# Altium PCB Pannel3.5x3.PcbDoc (part 1 of 4)
Units mil, origin at the board's own origin, x right, y up, seen from the top; angles counter-clockwise.
Board outline 3543.31 x 2771.65 mil, 4 copper layers (SIGNAL, GROUND, PWR, SIGNAL (Bottom)), stack 61.627 mil thick; 234 components, 186 nets, 894 pads, 439 vias.
Unrouted connection lines stored in the file: 4.
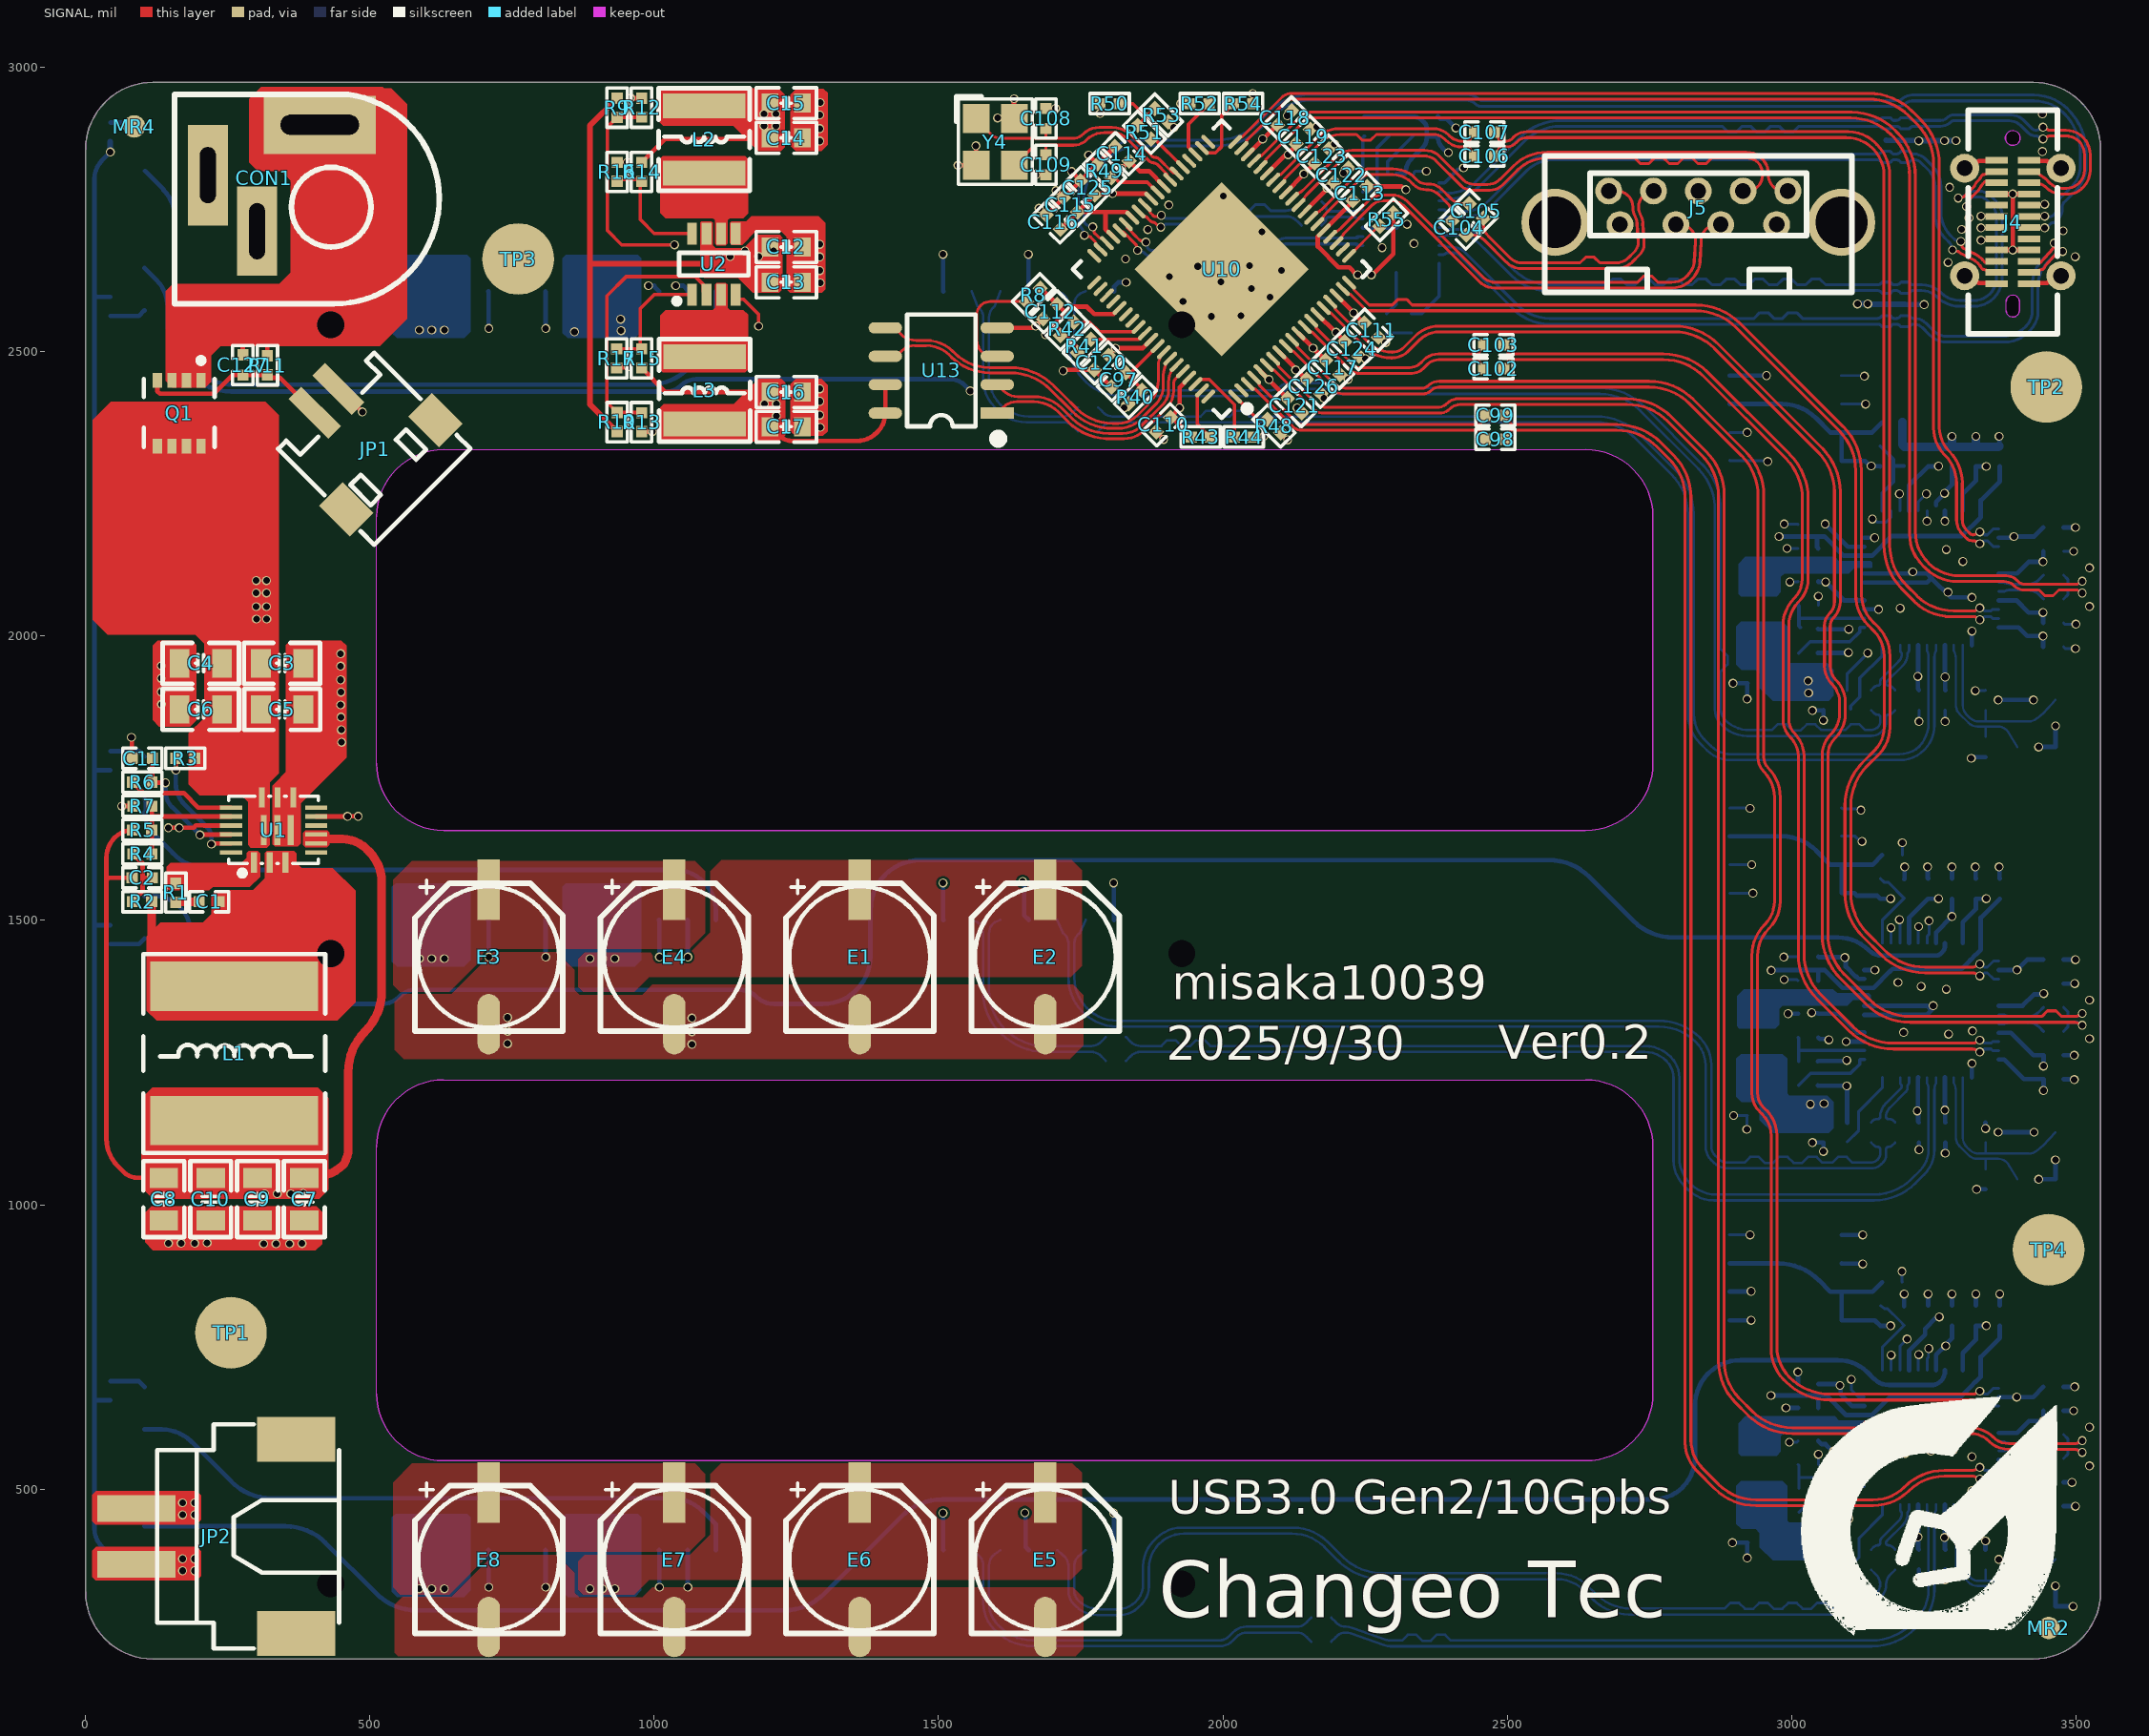
[diagram p0: SIGNAL view]
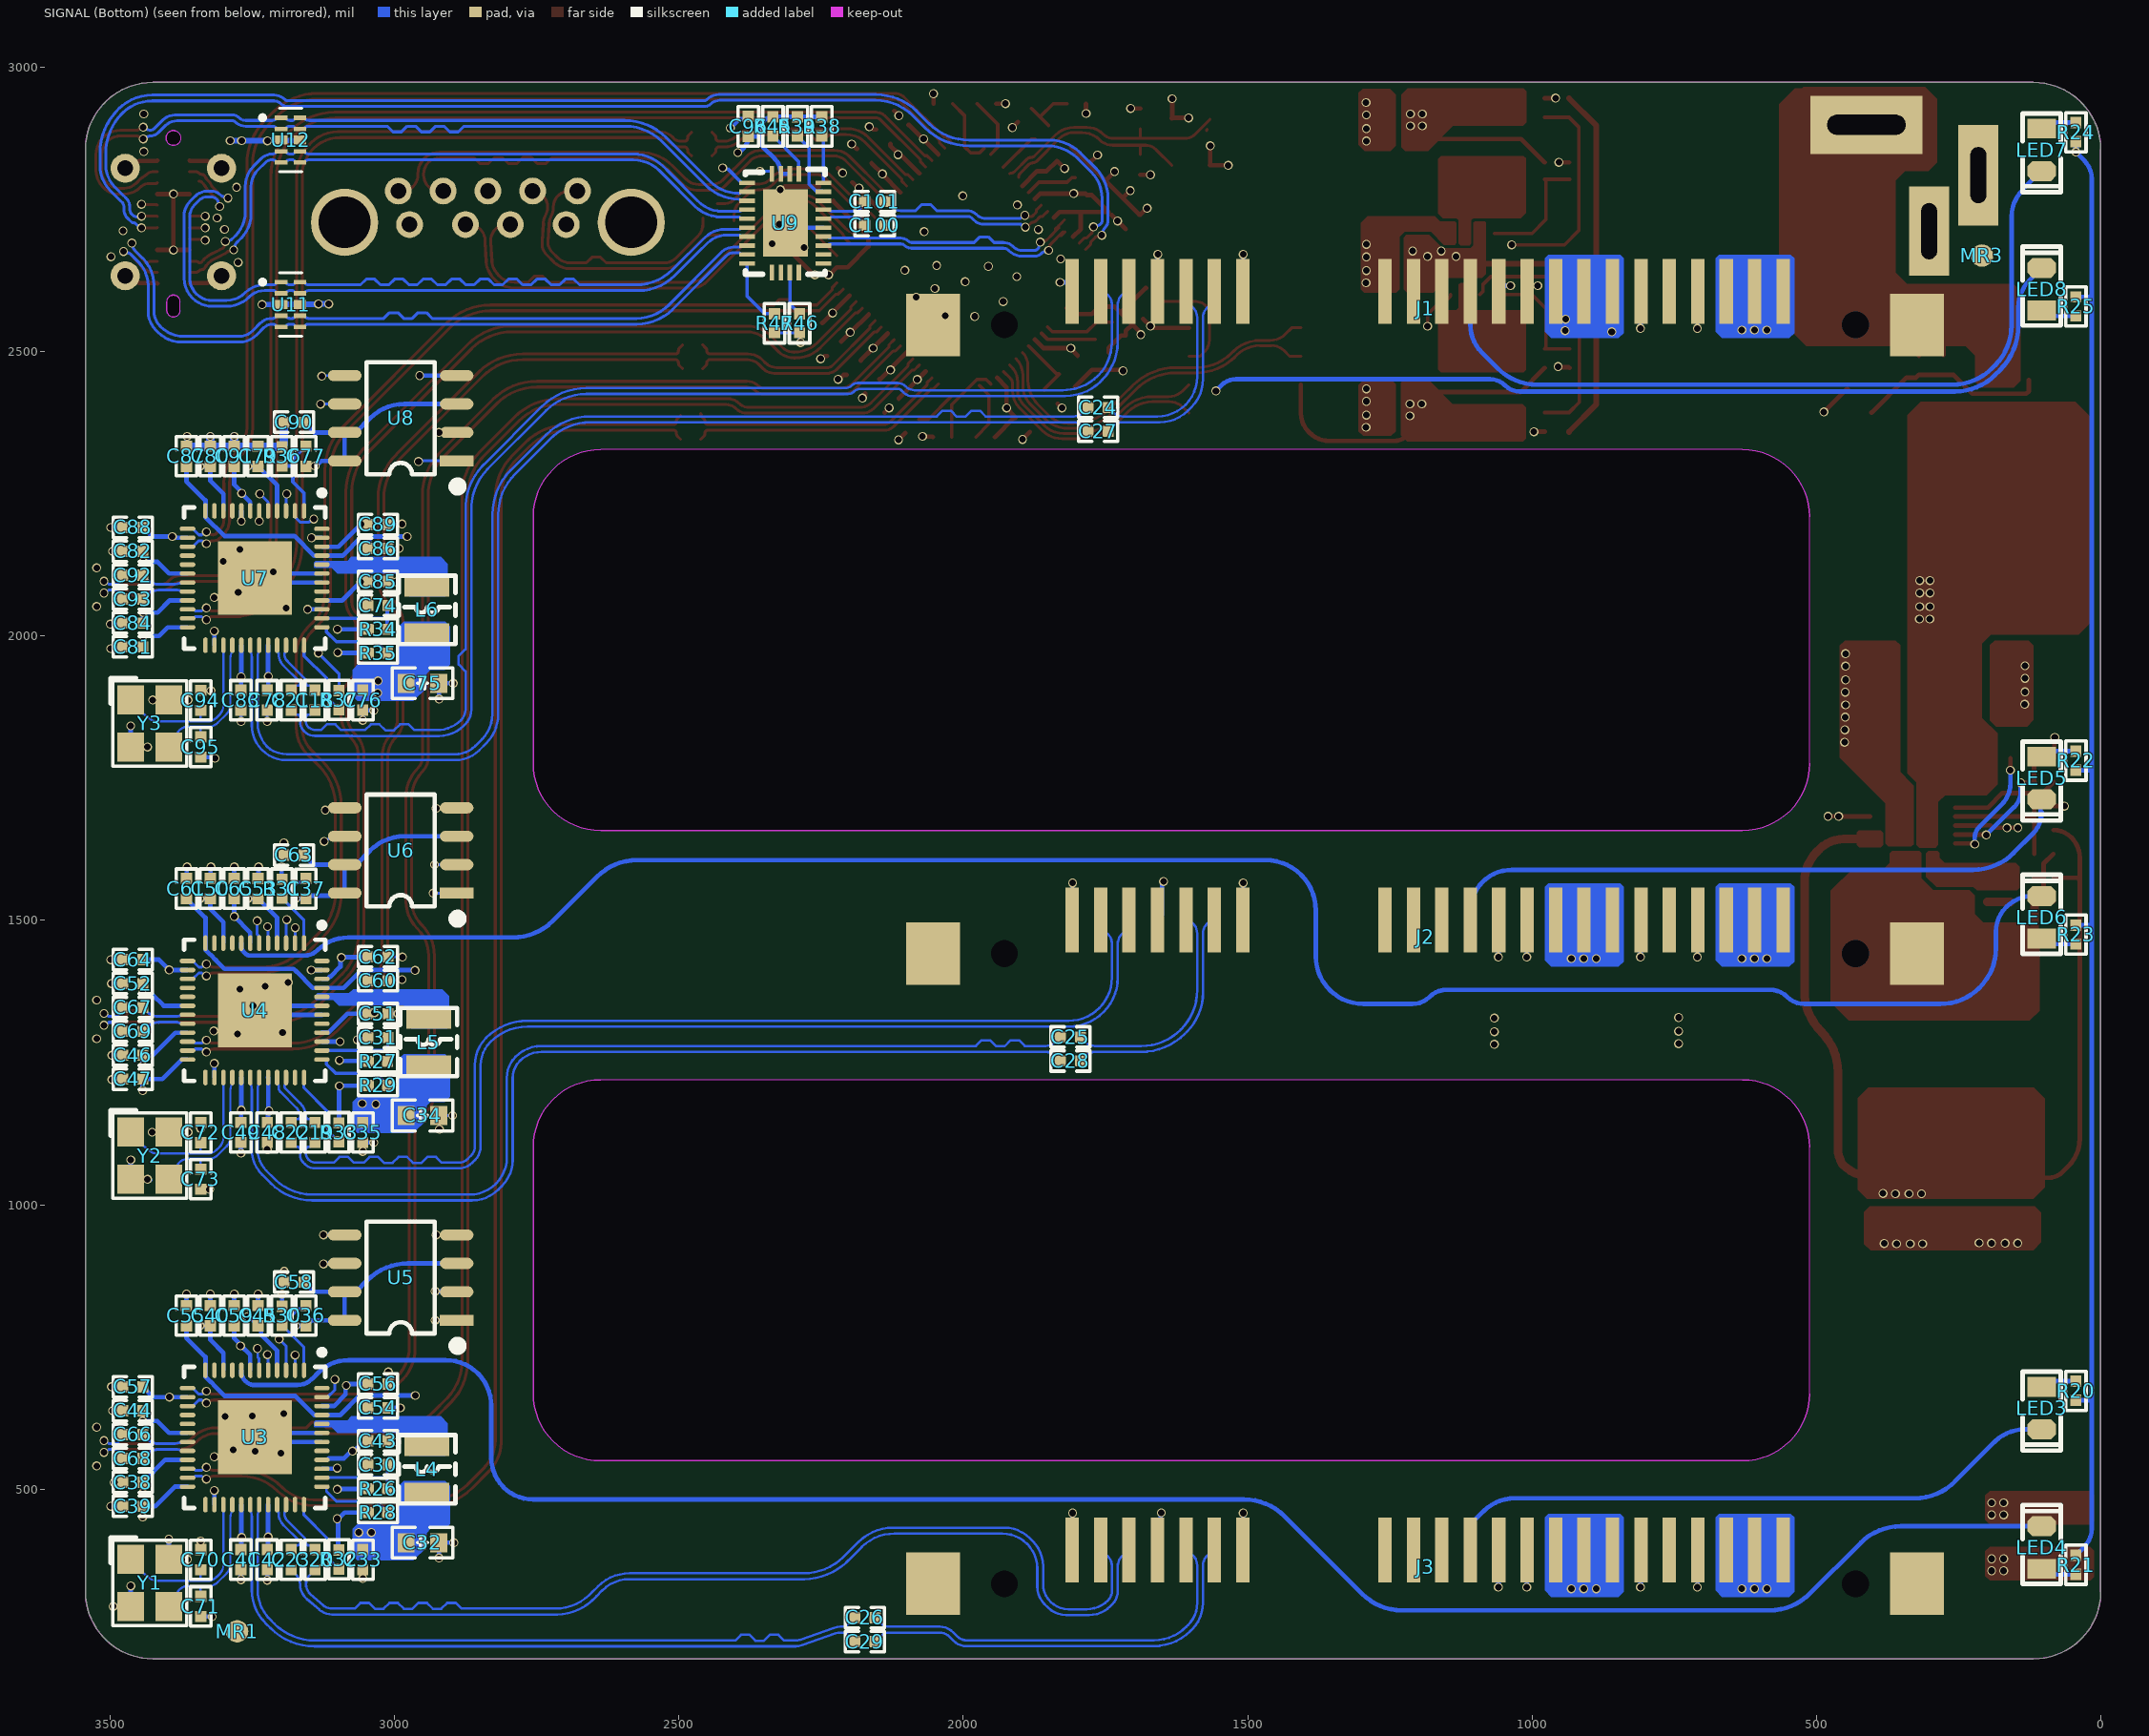
[diagram p1: SIGNAL (Bottom) view, seen from below]
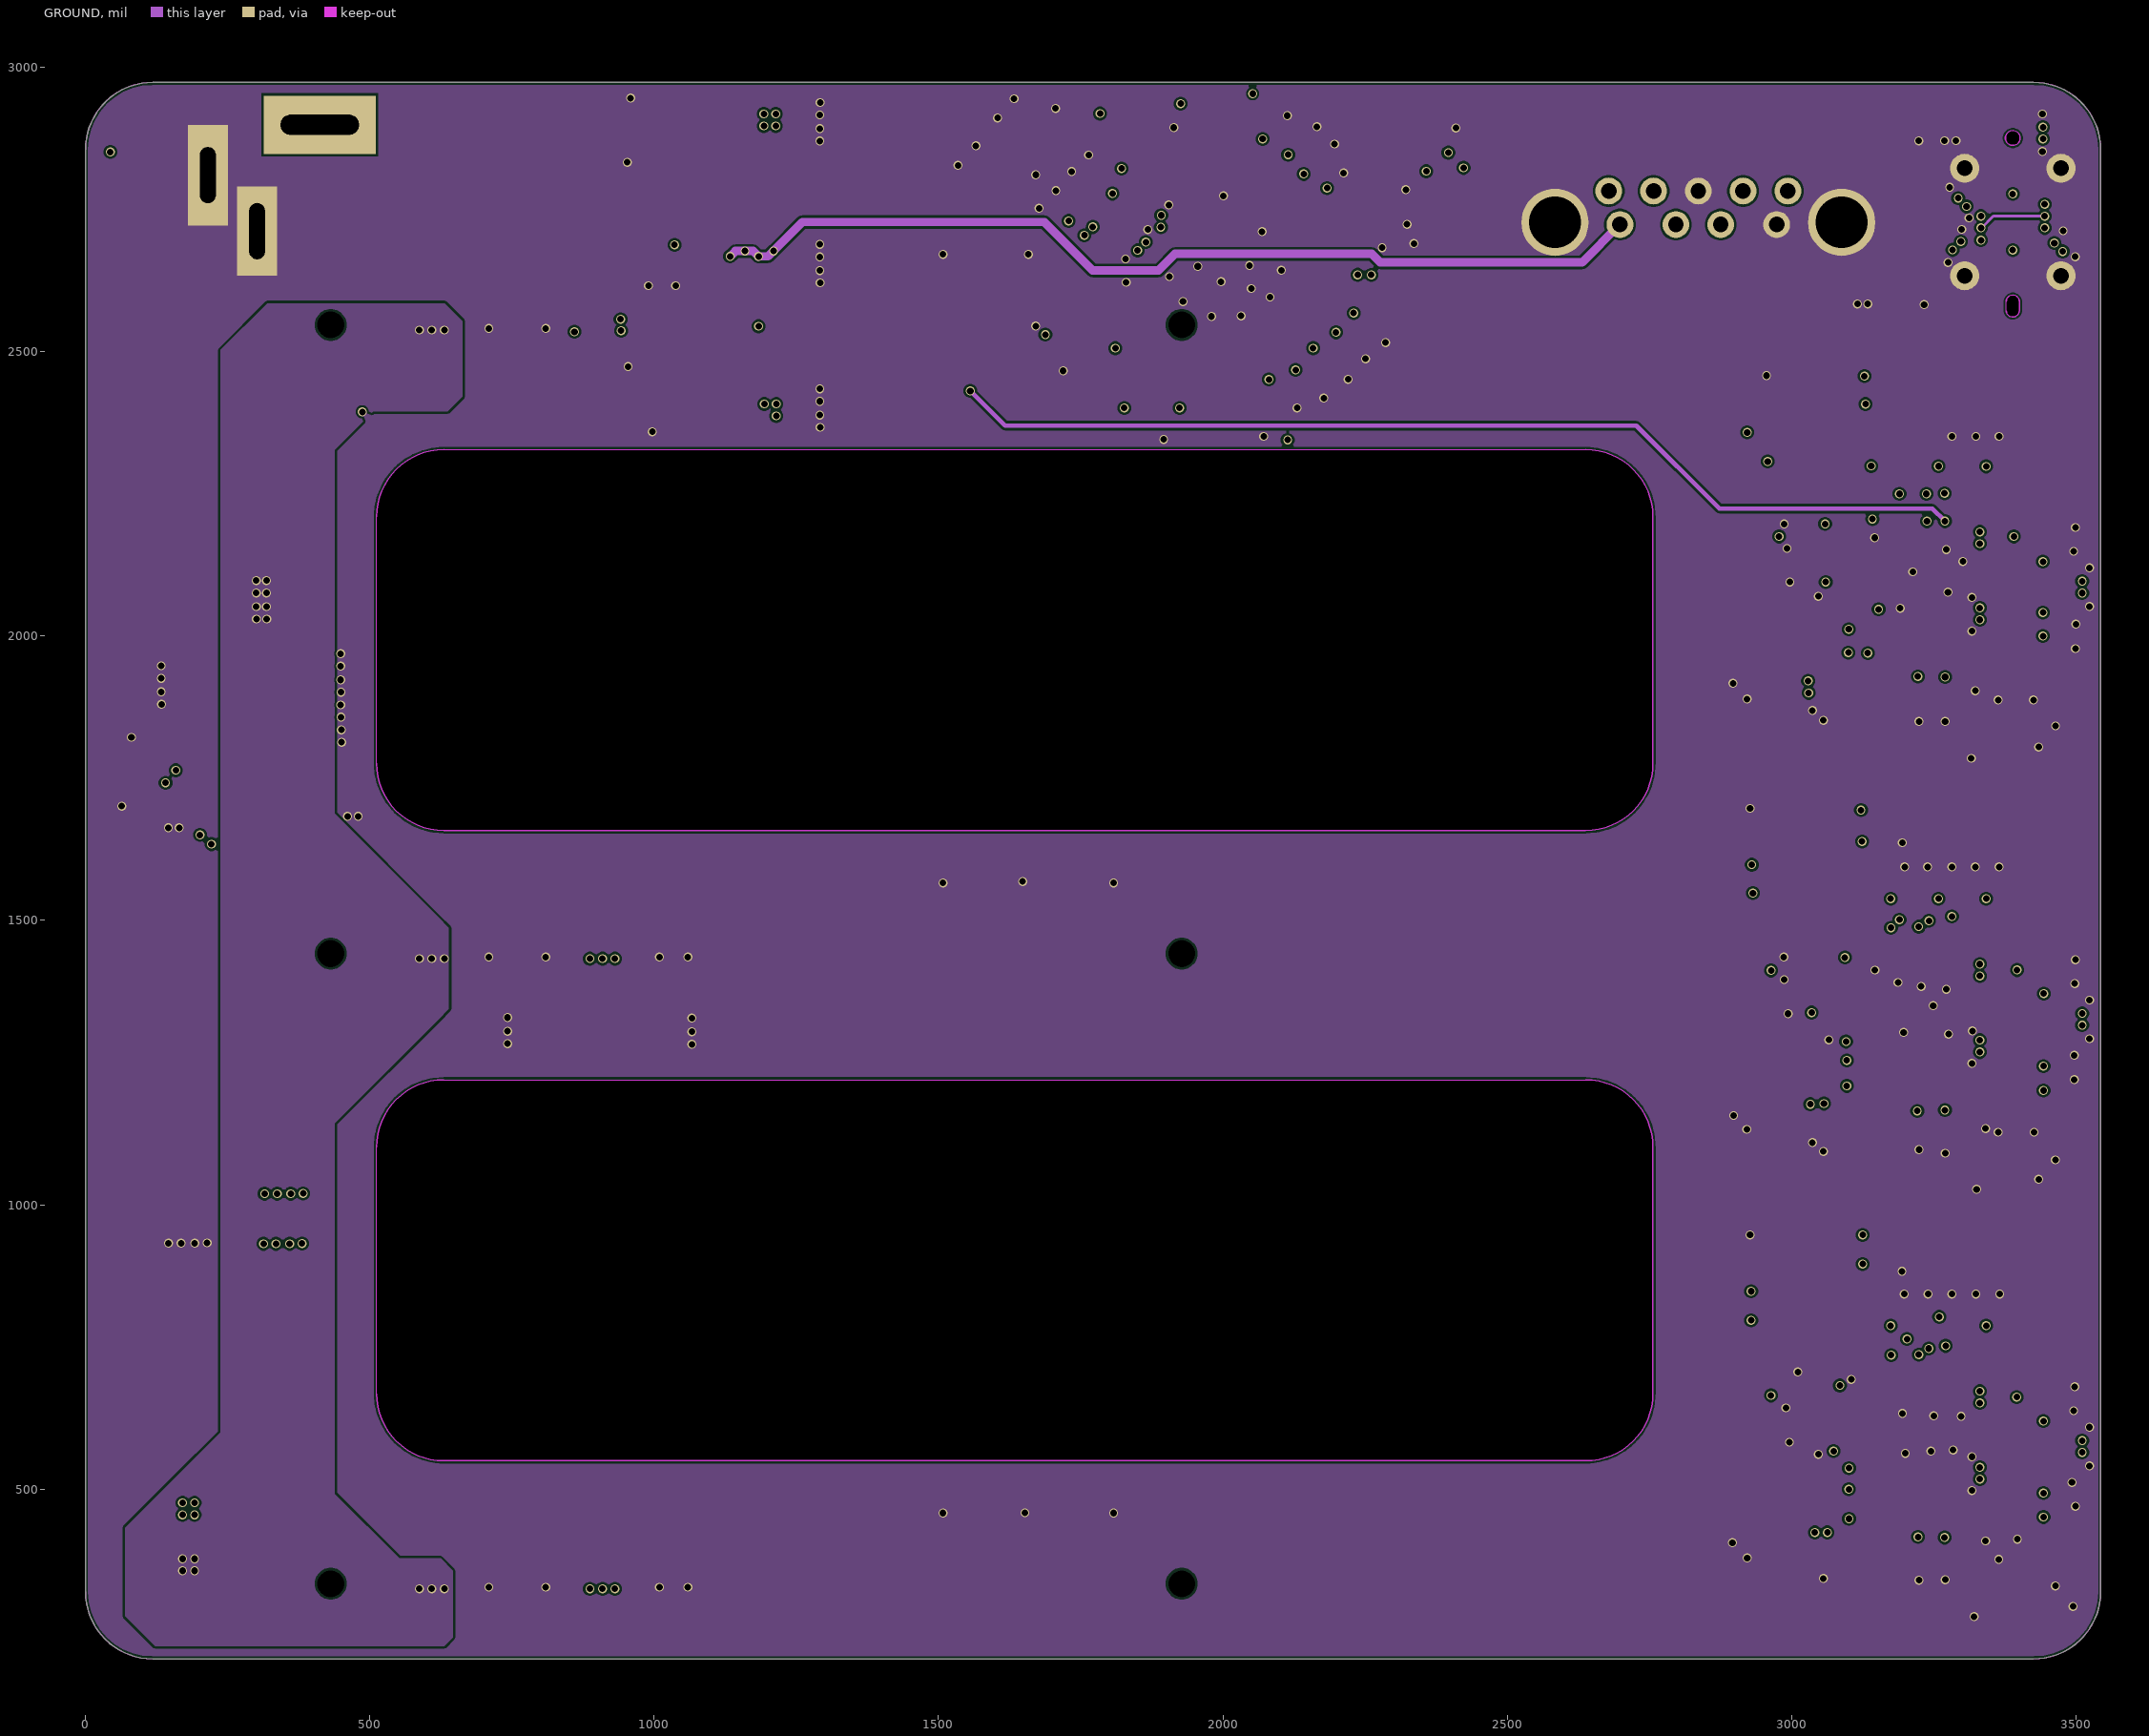
[diagram p2: GROUND]
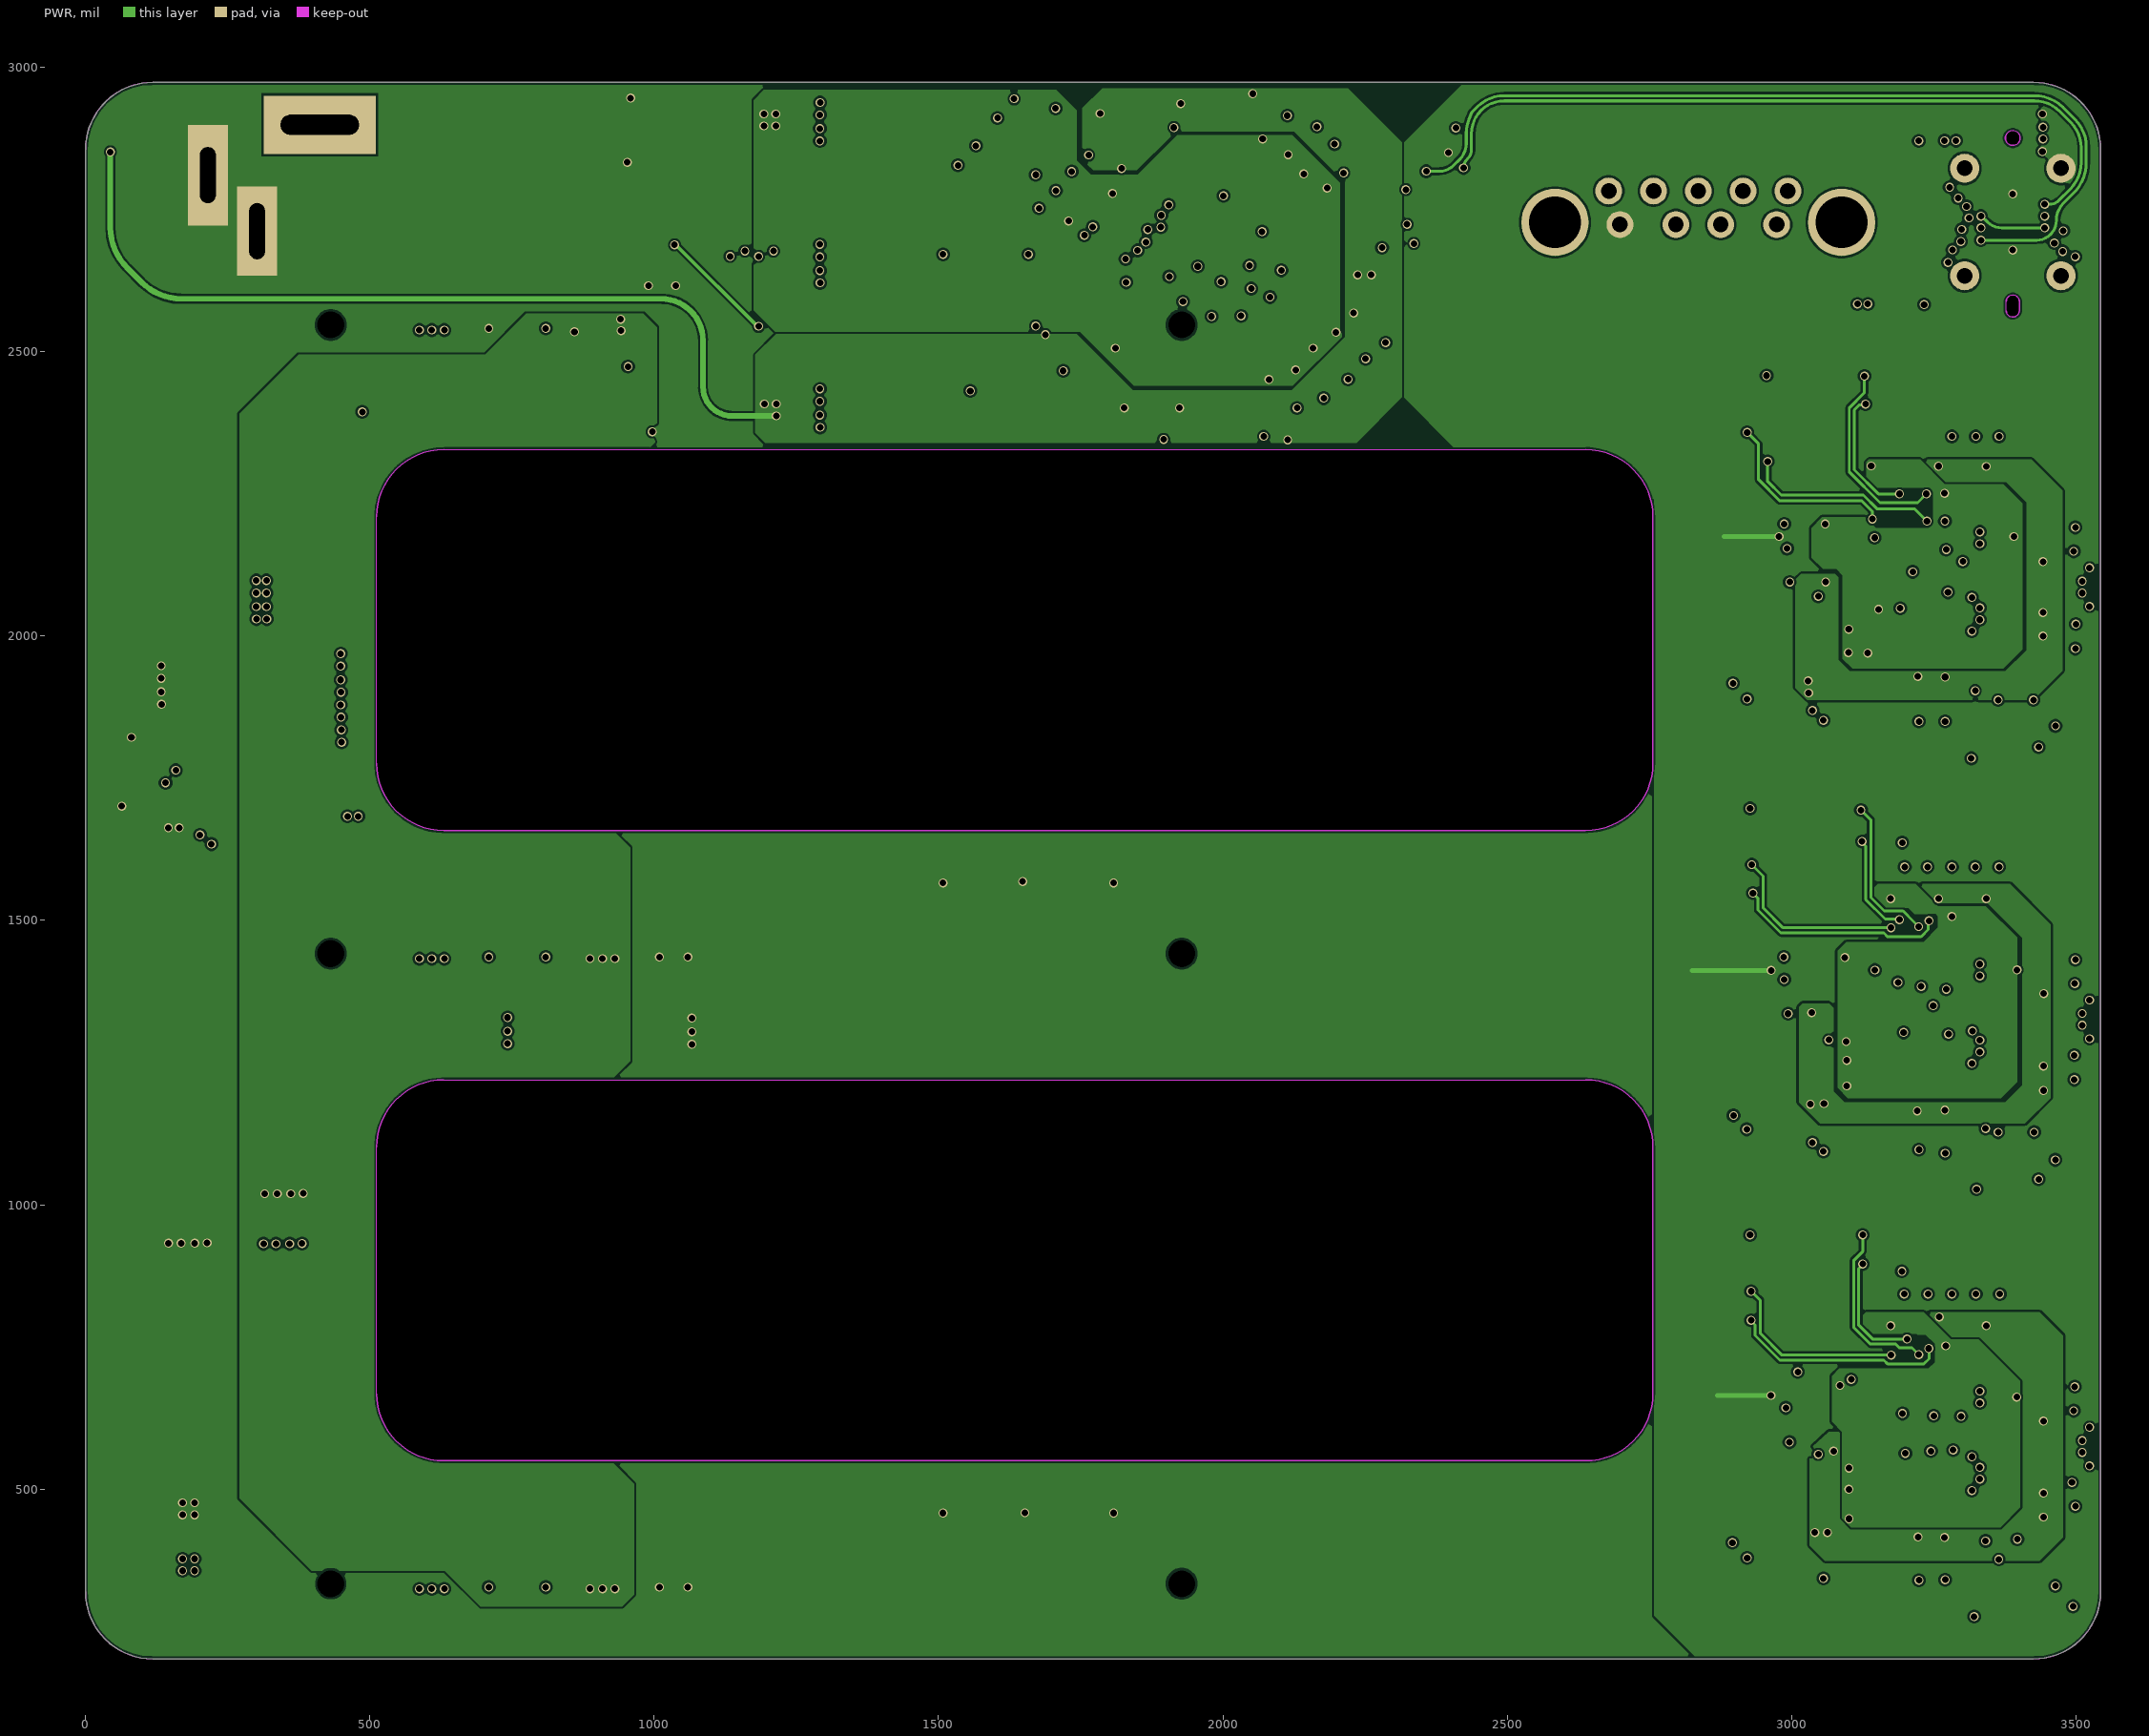
[diagram p3: PWR]
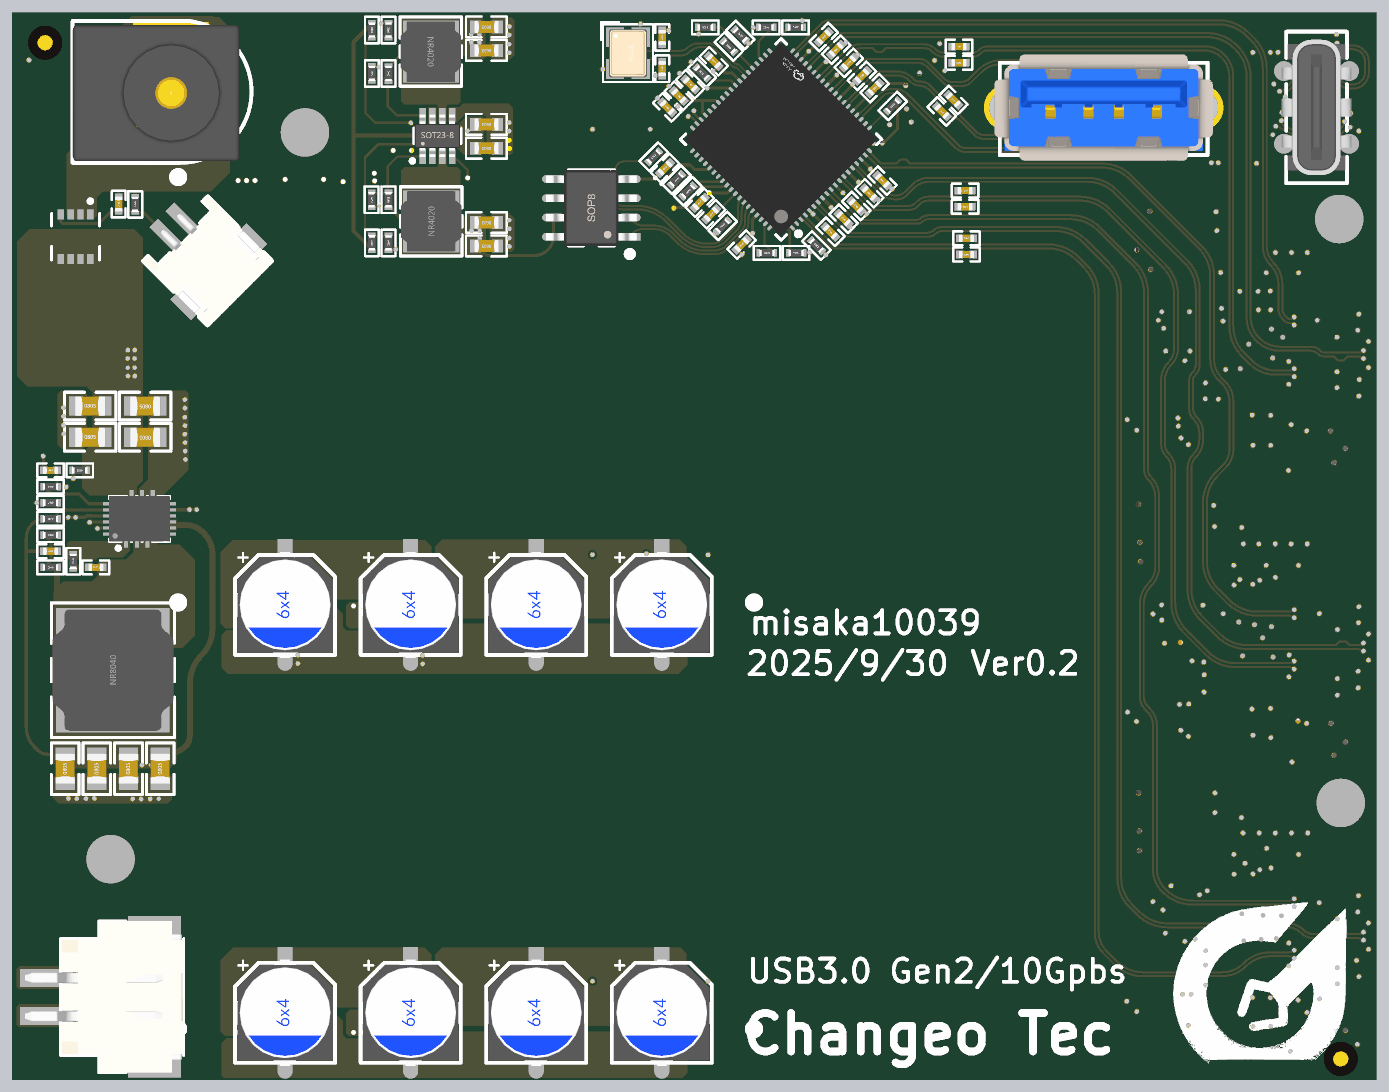
[diagram p7: 3D render of the assembled board from above, using the file's embedded part models]
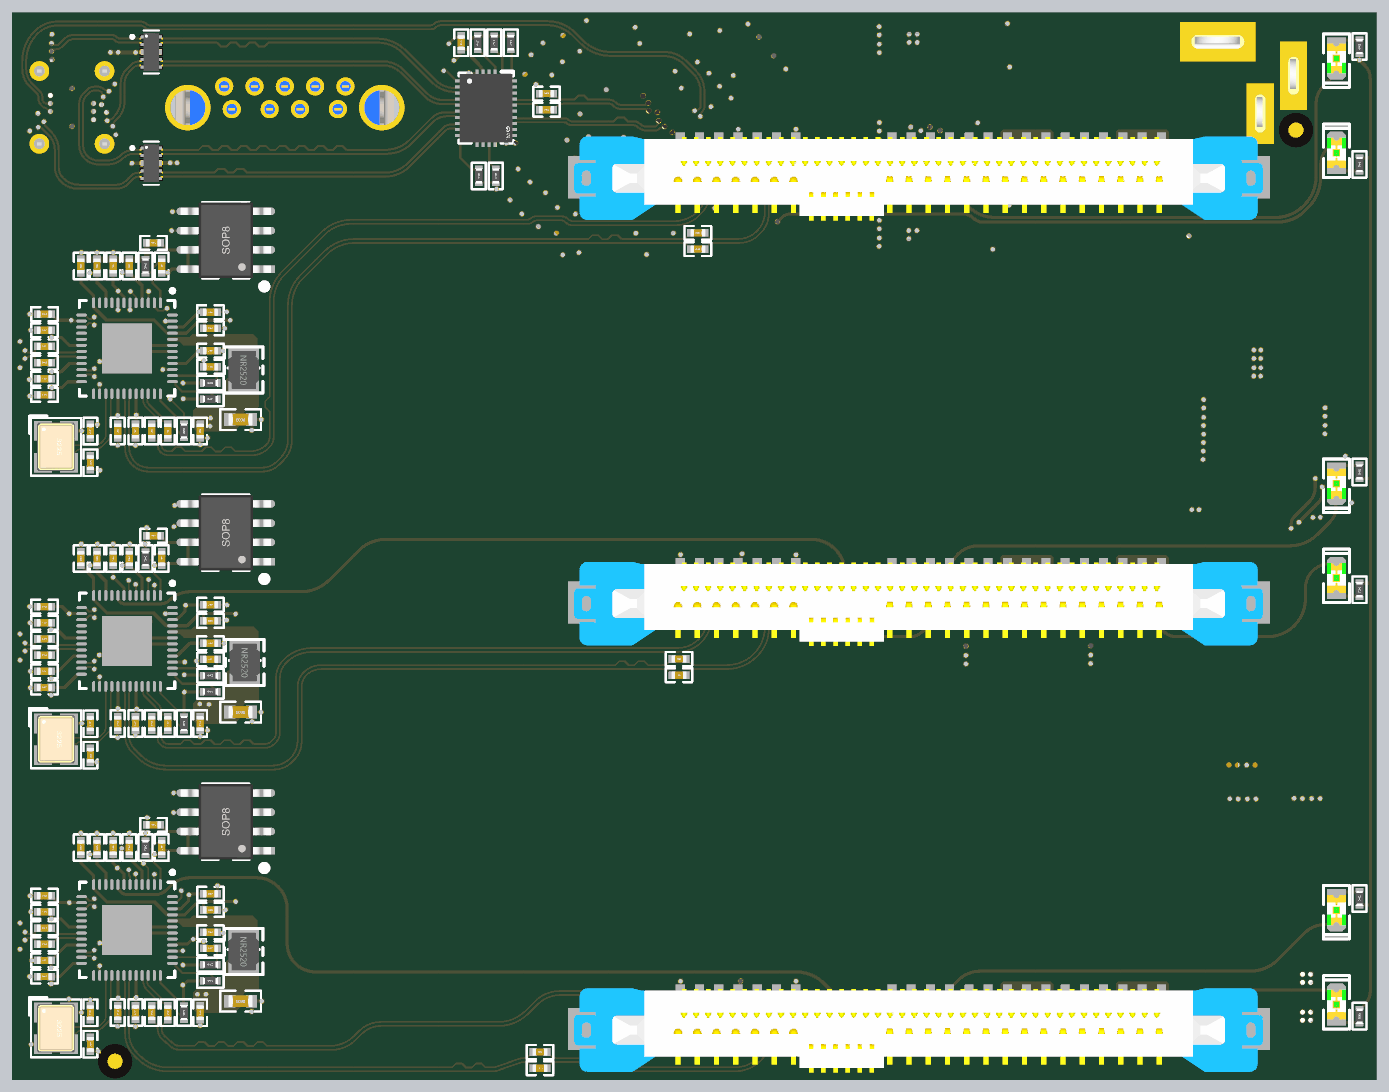
[diagram p8: 3D render of the assembled board from below, using the file's embedded part models]

## Layer stack, top to bottom
Top Solder: solder mask 0.3937, Solder Resist, Dk 3.5
SIGNAL: signal copper 1.4
Dielectric 2: prepreg 3.9134, PP-006, Dk 4.1
GROUND: signal copper 0.5984
Dielectric 1: dielectric 49.8031, FR-4, Dk 4.8
PWR: signal copper 0.5984
Dielectric 3: prepreg 3.9134, PP-006, Dk 4.1
SIGNAL (Bottom): signal copper 1.4
Bottom Solder: solder mask 0.3937, Solder Resist, Dk 3.5

## Board outline
118.36,201.69 cw(c118.4,319.85) 0.25,319.8 0.25,2855.24 cw(c118.34,2855.26) 118.36,2973.35 3425.45,2973.35 cw(c3425.54,2855.33) 3543.56,2855.24 3543.56,319.8 cw(c3425.47,319.78) 3425.45,201.69
cut-out: 630.17,1657.96 cw(c630.17,1776.07) 512.06,1776.07 512.06,2209.57 cw(c630.17,2209.57) 630.17,2327.68 2638.05,2327.68 cw(c2638.05,2209.57) 2756.16,2209.57 2756.16,1776.07 cw(c2638.05,1776.07) 2638.05,1657.96
cut-out: 512.06,668.09 512.06,1101.59 cw(c630.17,1101.59) 630.17,1219.7 2638.05,1219.7 cw(c2638.05,1101.59) 2756.16,1101.59 2756.16,668.09 cw(c2638.05,668.09) 2638.05,549.98 630.17,549.98 cw(c630.17,668.09)

## Design rules (kind name [scope] priority, off if disabled: settings)
Clearance [All] p1: gap=4 ignorepadtopadclearanceinfootprint=FALSE except(0: Arc-Text Arc-Hole Track-Text Track-Hole SMDPad-Text SMDPad-Hole THPad-Text THPad-Hole Via-Text Via-Hole Fill-Text Fill-Hole Poly-Text Poly-Hole Region-Text Region-Hole Text-Text Text-Hole; 5: Arc-Via Track-Via Via-Via; 6: SMDPad-Via THPad-Via; 10: THPad-THPad)
ComponentClearance [All] p1: gap=0 collisioncheckmode=3 verticalgap=0 showdistances=FALSE
DiffPairsRouting "Schematic Differential Pairs Routing_1" [InNetClass('SATA')] p1: maxlimit=6 minlimit=6 mostfreqgap=6 toplayer_minwidth=4.29 toplayer_maxwidth=4.29 toplayer_prefwidth=4.29 midlayer1_minwidth=4.29 midlayer1_maxwidth=4.29 midlayer1_prefwidth=4.29 midlayer2_minwidth=4.29 midlayer2_maxwidth=4.29 midlayer2_prefwidth=4.29 bottomlayer_minwidth=4.29 bottomlayer_maxwidth=4.29 bottomlayer_prefwidth=4.29 maxuncoupledlength=500
DiffPairsRouting "Schematic Differential Pairs Routing" [InNetClass('USB')] p2: maxlimit=5 minlimit=5 mostfreqgap=5 toplayer_minwidth=5.1 toplayer_maxwidth=5.1 toplayer_prefwidth=5.1 midlayer1_minwidth=5.1 midlayer1_maxwidth=5.1 midlayer1_prefwidth=5.1 midlayer2_minwidth=5.1 midlayer2_maxwidth=5.1 midlayer2_prefwidth=5.1 bottomlayer_minwidth=5.1 bottomlayer_maxwidth=5.1 bottomlayer_prefwidth=5.1 maxuncoupledlength=500
DiffPairsRouting [All] p3: maxlimit=10 minlimit=10 mostfreqgap=10 toplayer_minwidth=15 toplayer_maxwidth=15 toplayer_prefwidth=15 midlayer1_minwidth=15 midlayer1_maxwidth=15 midlayer1_prefwidth=15 midlayer2_minwidth=15 midlayer2_maxwidth=15 midlayer2_prefwidth=15 bottomlayer_minwidth=15 bottomlayer_maxwidth=15 bottomlayer_prefwidth=15 maxuncoupledlength=500
MinimumSolderMaskSliver [All] p1: minsoldermaskwidth=0
NetAntennae [All] p1 off: netantennaetolerance=3.94
PlaneClearance [All] p1: clearance=8
PlaneConnect [All] p1: planeconnectstyle=Direct reliefexpansion=20 reliefentries=4 reliefconductorwidth=10 reliefairgap=10
PolygonConnect [All] p1: connectstyle=Direct reliefconductorwidth=10 reliefentries=4 polygonreliefangle="90 Angle" airgapwidth=10
RoutingVias "Schematic Routing Via Style_1" [InNetClass('SATA')] p1: holewidth=11.81 width=15.75 viastyle="Through Hole" minholewidth=7.87 minwidth=11.81 maxholewidth=28 maxwidth=50
RoutingVias "Schematic Routing Via Style" [InNetClass('USB')] p2: holewidth=11.81 width=15.75 viastyle="Through Hole" minholewidth=7.87 minwidth=11.81 maxholewidth=28 maxwidth=39.37
RoutingVias [All] p3: holewidth=11.81 width=15.75 viastyle="Through Hole" minholewidth=11.81 minwidth=15.75 maxholewidth=19.68 maxwidth=23.62
SilkToSolderMaskClearance [IsPad] p1: minsilkscreentomaskgap=0 clearancetoexposedcopper=TRUE
SolderMaskExpansion 过孔盖油 [isvia] p1: expansion=4 istentingtop=TRUE
Width [All] p1: maxlimit=100 minlimit=2 preferedwidth=4
23 further rules are at their usual default settings.

## Classes and differential pairs
net class USB: cap_SSRX1_N cap_SSRX1_P cap_SSRX2_N cap_SSRX2_P cap_SSTX1_N cap_SSTX1_P cap_SSTX2_N cap_SSTX2_P cap_SSTX3_N cap_SSTX3_P cap_SSTX4_N cap_SSTX4_P cap_SSTX_N cap_SSTX_P HSD1_N HSD1_P HSD2_N HSD2_P HSD3_N HSD3_P HSD4_N HSD4_P IN_CC1 IN_CC2 IN_SSRX1_N IN_SSRX1_P IN_SSRX2_N IN_SSRX2_P IN_SSTX1_N IN_SSTX1_P IN_SSTX2_N IN_SSTX2_P SSRX1_N SSRX1_P SSRX2_N SSRX2_P SSRX3_N SSRX3_P SSRX4_N SSRX4_P SSRX_N SSRX_P SSTX1_N SSTX1_P SSTX2_N SSTX2_P SSTX3_N SSTX3_P SSTX4_N SSTX4_P SSTX_N SSTX_P USBD_N USBD_P
net class SATA: cap_RX1_N cap_RX1_P cap_RX2_N cap_RX2_P cap_RX3_N cap_RX3_P cap_TX1_N cap_TX1_P cap_TX2_N cap_TX2_P cap_TX3_N cap_TX3_P RX1_N RX1_P RX2_N RX2_P RX3_N RX3_P TX1_N TX1_P TX2_N TX2_P TX3_N TX3_P
net class PWR: GND VBUS VCC1V0 VCC1V2-A VCC1V2-B VCC1V2-C VCC3V3 VCC3V3-A VCC3V3-B VCC3V3-C VCC5V VCC12V VIN
component class vl822: C96 C97 C98 C99 C100 C101 C102 C103 C104 C105 C106 C107 C108 C109 C110 C111 C112 C113 C114 C115 C116 C117 C118 C119 C120 C121 C122 C123 C124 C125 C126 R8 R38 R39 R40 R41 R42 R43 R44 R45 R46 R47 R48 R49 R50 R51 R52 R53 R54 R55 U9 U10 U11 U12 U13 Y4
component class pwr: C1 C2 C3 C4 C5 C6 C7 C8 C9 C10 C11 C12 C13 C14 C15 C16 C17 C127 E1 E2 E3 E4 E5 E6 E7 E8 JP1 JP2 L1 L2 L3 MR1 MR2 MR3 MR4 Q1 R1 R2 R3 R4 R5 R6 R7 R9 R10 R11 R12 R13 R14 R15 R16 R17 U1 U2
component class jmb575: C30 C31 C32 C33 C34 C35 C36 C37 C38 C39 C40 C41 C42 C43 C44 C45 C46 C47 C48 C49 C50 C51 C52 C53 C54 C55 C56 C57 C58 C59 C60 C61 C62 C63 C64 C65 C66 C67 C68 C69 C70 C71 C72 C73 C74 C75 C76 C77 C78 C79 C80 C81 C82 C83 C84 C85 C86 C87 C88 C89 C90 C91 C92 C93 C94 C95 L4 L5 L6 R26 R27 R28 R29 R30 R31 R32 R33 R34 R35 R36 R37 U3 U4 U5 U6 U7 U8 Y1 Y2 Y3
component class connector: C18 C19 C20 C21 C22 C23 C24 C25 C26 C27 C28 C29 CON1 J1 J2 J3 J4 J5 LED3 LED4 LED5 LED6 LED7 LED8 R20 R21 R22 R23 R24 R25 TP1 TP2 TP3 TP4
differential pair cap_SSRX4: +cap_SSRX4_P -cap_SSRX4_N
differential pair cap_SSRX1: +cap_SSRX1_P -cap_SSRX1_N
differential pair SSTX1: +SSTX1_P -SSTX1_N
differential pair cap_TX2: +cap_TX2_P -cap_TX2_N
differential pair cap_RX3: +cap_RX3_P -cap_RX3_N
differential pair TX1: +TX1_P -TX1_N
differential pair RX1: +RX1_P -RX1_N
differential pair cap_TX3: +cap_TX3_P -cap_TX3_N
differential pair cap_RX2: +cap_RX2_P -cap_RX2_N
differential pair USBD: +USBD_P -USBD_N
differential pair TX3: +TX3_P -TX3_N
differential pair TX2: +TX2_P -TX2_N
differential pair SSTX: +SSTX_P -SSTX_N
differential pair SSTX4: +SSTX4_P -SSTX4_N
differential pair SSTX3: +SSTX3_P -SSTX3_N
differential pair SSTX2: +SSTX2_P -SSTX2_N
differential pair SSRX: +SSRX_P -SSRX_N
differential pair SSRX4: +SSRX4_P -SSRX4_N
differential pair SSRX3: +SSRX3_P -SSRX3_N
differential pair SSRX2: +SSRX2_P -SSRX2_N
differential pair SSRX1: +SSRX1_P -SSRX1_N
differential pair RX3: +RX3_P -RX3_N
differential pair RX2: +RX2_P -RX2_N
differential pair IN_SSTX2: +IN_SSTX2_P -IN_SSTX2_N
differential pair IN_SSTX1: +IN_SSTX1_P -IN_SSTX1_N
differential pair IN_SSRX2: +IN_SSRX2_P -IN_SSRX2_N
differential pair IN_SSRX1: +IN_SSRX1_P -IN_SSRX1_N
differential pair HSD4: +HSD4_P -HSD4_N
differential pair HSD3: +HSD3_P -HSD3_N
differential pair HSD2: +HSD2_P -HSD2_N
differential pair HSD1: +HSD1_P -HSD1_N
differential pair cap_TX1: +cap_TX1_P -cap_TX1_N
differential pair cap_SSTX: +cap_SSTX_P -cap_SSTX_N
differential pair cap_SSTX4: +cap_SSTX4_P -cap_SSTX4_N
differential pair cap_SSTX3: +cap_SSTX3_P -cap_SSTX3_N
differential pair cap_SSTX2: +cap_SSTX2_P -cap_SSTX2_N
differential pair cap_SSTX1: +cap_SSTX1_P -cap_SSTX1_N
differential pair cap_SSRX3: +cap_SSRX2_P -cap_SSRX2_N
differential pair cap_RX1: +cap_RX1_P -cap_RX1_N

## Components (designator, comment, footprint, x,y, rotation, side; value= is the part's Value field where it differs from the comment)
C1 "220nF 25V" C0402_L 217.72,1533 r0 top
C2 "220pF 25V" C0402_L 100.13,1575 r0 top
C3 "22uF 25V" C0805_L 345.79,1952 r180 top
C4 "22uF 25V" C0805_L 203,1952 r0 top
C5 "4.7uF 25V" C0805_L 346,1871 r180 top
C6 "100nF 25V" C0805_L 203,1871 r0 top
C7 "22uF 10V" C0805_L 385,1010 r90 top
C8 "22uF 10V" C0805_L 138,1010 r90 top
C9 "22uF 10V" C0805_L 302.66,1010 r90 top
C10 "22uF 10V" C0805_L 220.33,1010 r90 top
C11 "1uF 25V" C0402_L 100.13,1785 r0 top
C12 "22uF 10V" C0603_L 1232.54,2684 r180 top
C13 "22uF 10V" C0603_L 1232.54,2622 r180 top
C14 "4.7uF 6.3V" C0603_L 1232.54,2876 r180 top
C15 "22uF 6.3V" C0603_L 1232.54,2937 r180 top
C16 "22uF 6.3V" C0603_L 1232.54,2429 r180 top
C17 "4.7uF 6.3V" C0603_L 1232.54,2368 r180 top
C18 "10nF 6.3V" C0402_L 3140,1887.28 r90 bottom
C19 "10nF 6.3V" C0402_L 3140,1127.28 r90 bottom
C20 "10nF 6.3V" C0402_L 3140,376 r90 bottom
C21 "10nF 6.3V" C0402_L 3182,1887.28 r90 bottom
C22 "10nF 6.3V" C0402_L 3182,1127.28 r90 bottom
C23 "10nF 6.3V" C0402_L 3182,376 r90 bottom
C24 "10nF 6.3V" C0402_L 1763,2402 r0 bottom
C25 "10nF 6.3V" C0402_L 1812,1295 r0 bottom
C26 "10nF 6.3V" C0402_L 2173,274 r0 bottom
C27 "10nF 6.3V" C0402_L 1763,2360 r0 bottom
C28 "10nF 6.3V" C0402_L 1812,1253 r0 bottom
C29 "10nF 6.3V" C0402_L 2173,232 r0 bottom
C30 "1uF 10V" C0402_L 3029.28,543 r180 bottom
C31 "1uF 10V" C0402_L 3029.28,1294 r180 bottom
C32 "10uF 6.3V" C0603_L 2951,406 r0 bottom
C33 "100nF 6.3V" C0402_L 3056,376 r90 bottom
C34 "10uF 6.3V" C0603_L 2951,1157 r0 bottom
C35 "100nF 6.3V" C0402_L 3056,1127.28 r90 bottom
C36 "1uF 10V" C0402_L 3156,805 r270 bottom
C37 "1uF 10V" C0402_L 3156,1556 r270 bottom
C38 "100nF 6.3V" C0402_L 3460.55,512 r180 bottom
C39 "100nF 6.3V" C0402_L 3460.55,470 r180 bottom
C40 "100nF 6.3V" C0402_L 3324,805 r270 bottom
C41 "100nF 6.3V" C0402_L 3270.22,376.28 r90 bottom
C42 "100nF 6.3V" C0402_L 3224,376.28 r90 bottom
C43 "100nF 6.3V" C0402_L 3029.28,585 r0 bottom
C44 "100nF 6.3V" C0402_L 3460.55,638 r180 bottom
C45 "100nF 6.3V" C0402_L 3240,805 r270 bottom
C46 "100nF 6.3V" C0402_L 3460.55,1263 r180 bottom
C47 "100nF 6.3V" C0402_L 3460.55,1221 r180 bottom
C48 "100nF 6.3V" C0402_L 3224,1127.28 r90 bottom
C49 "100nF 6.3V" C0402_L 3270.22,1127.28 r90 bottom
C50 "100nF 6.3V" C0402_L 3324,1556 r270 bottom
C51 "100nF 6.3V" C0402_L 3029.28,1336 r0 bottom
C52 "100nF 6.3V" C0402_L 3460.55,1389 r180 bottom
C53 "100nF 6.3V" C0402_L 3240,1556 r270 bottom
C54 "100nF 6.3V" C0402_L 3029.28,643 r0 bottom
C55 "100nF 6.3V" C0402_L 3366,805 r270 bottom
C56 "100nF 6.3V" C0402_L 3029.28,685 r0 bottom
C57 "100nF 6.3V" C0402_L 3460.55,680 r180 bottom
C58 "100nF 6.3V" C0402_L 3177,864 r180 bottom
C59 "100nF 6.3V" C0402_L 3282,805 r270 bottom
C60 "100nF 6.3V" C0402_L 3029.28,1394 r0 bottom
C61 "100nF 6.3V" C0402_L 3366,1556 r270 bottom
C62 "100nF 6.3V" C0402_L 3029.28,1436 r0 bottom
C63 "100nF 6.3V" C0402_L 3177,1615 r180 bottom
C64 "100nF 6.3V" C0402_L 3460.55,1431 r180 bottom
C65 "100nF 6.3V" C0402_L 3282,1556 r270 bottom
C66 "100nF 6.3V" C0402_L 3460.55,596 r180 bottom
C67 "100nF 6.3V" C0402_L 3460.55,1347 r180 bottom
C68 "100nF 6.3V" C0402_L 3460.55,554 r180 bottom
C69 "100nF 6.3V" C0402_L 3460.55,1305 r180 bottom
C70 "33pF/16V" C0402_L 3341,376 r90 bottom
C71 "33pF/16V" C0402_L 3341,294 r270 bottom
C72 "33pF/16V" C0402_L 3341,1127 r90 bottom
C73 "33pF/16V" C0402_L 3341,1045 r270 bottom
C74 "1uF 10V" C0402_L 3029.28,2054 r180 bottom
C75 "10uF 6.3V" C0603_L 2951,1917 r0 bottom
C76 "100nF 6.3V" C0402_L 3056,1887.28 r90 bottom
C77 "1uF 10V" C0402_L 3156,2316 r270 bottom
C78 "100nF 6.3V" C0402_L 3224,1887.28 r90 bottom
C79 "100nF 6.3V" C0402_L 3240,2316 r270 bottom
C80 "100nF 6.3V" C0402_L 3324,2316 r270 bottom
C81 "100nF 6.3V" C0402_L 3460.55,1981 r180 bottom
C82 "100nF 6.3V" C0402_L 3460.55,2149 r180 bottom
C83 "100nF 6.3V" C0402_L 3270.22,1887.28 r90 bottom
C84 "100nF 6.3V" C0402_L 3460.55,2023 r180 bottom
C85 "100nF 6.3V" C0402_L 3029.28,2096 r0 bottom
C86 "100nF 6.3V" C0402_L 3029.28,2154 r0 bottom
C87 "100nF 6.3V" C0402_L 3366,2316 r270 bottom
C88 "100nF 6.3V" C0402_L 3460.55,2191 r180 bottom
C89 "100nF 6.3V" C0402_L 3029.28,2196 r0 bottom
C90 "100nF 6.3V" C0402_L 3177,2376 r180 bottom
C91 "100nF 6.3V" C0402_L 3282,2316 r270 bottom
C92 "100nF 6.3V" C0402_L 3460.55,2107 r180 bottom
C93 "100nF 6.3V" C0402_L 3460.55,2065 r180 bottom
C94 "33pF/16V" C0402_L 3341,1887 r90 bottom
C95 "33pF/16V" C0402_L 3341,1805 r270 bottom
C96 "100nF 10V" C0402_L 2378,2896.13 r270 bottom
C97 "100nF 6.3V" C0402_L 1816.47,2450.47 r225 top
C98 "100nF 6.3V" C0402_L 2479.5,2345.9 r180 top
C99 "100nF 6.3V" C0402_L 2479.5,2387.9 r180 top
C100 "100nF 6.3V" C0402_L 2156,2722 r180 bottom
C101 "100nF 6.3V" C0402_L 2156,2764 r180 bottom
C102 "100nF 6.3V" C0402_L 2476,2470 r180 top
C103 "100nF 6.3V" C0402_L 2476,2512 r180 top
C104 "100nF 6.3V" C0402_L 2415.47,2717.53 r135 top
C105 "100nF 6.3V" C0402_L 2445.47,2747.53 r135 top
C106 "100nF 6.3V" C0402_L 2460,2844 r180 top
C107 "100nF 6.3V" C0402_L 2460,2886 r180 top
C108 "22pF/16V" C0402_L 1689,2910 r90 top
C109 "22pF/16V" C0402_L 1689,2828.72 r270 top
C110 "100nF 6.3V" C0402_L 1895.47,2371.47 r45 top
C111 "100nF 6.3V" C0402_L 2261,2538 r135 top
C112 "100nF 6.3V" C0402_L 1696.47,2570.47 r45 top
C113 "100nF 6.3V" C0402_L 2241,2778 r225 top
C114 "100nF 6.3V" C0402_L 1823,2848 r315 top
C115 "100nF 6.3V" C0402_L 1732,2758 r315 top
C116 "100nF 6.3V" C0402_L 1702,2728 r315 top
C117 "100nF 6.3V" C0402_L 2193,2472 r135 top
C118 "100nF 6.3V" C0402_L 2109,2911 r225 top
C119 "100nF 6.3V" C0402_L 2141,2878 r225 top
C120 "100nF 6.3V" C0402_L 1786.47,2480.47 r45 top
C121 "100nF 6.3V" C0402_L 2126,2405 r135 top
C122 "100nF 6.3V" C0402_L 2208,2810 r225 top
C123 "100nF 6.3V" C0402_L 2174,2844 r225 top
C124 "100nF 6.3V" C0402_L 2227,2505 r135 top
C125 "100nF 6.3V" C0402_L 1762,2788 r315 top
C126 "100nF 6.3V" C0402_L 2160,2439 r135 top
C127 "1nF 25V" C0402_L 277,2476.72 r270 top
CON1 "3.5*1.3" DC-012 412.24,2899.01 r270 top locked
E1 "100uF/25V" "CS 6*4 - B" 1361.8,1435.67 r90 top
E2 "100uF/25V" "CS 6*4 - B" 1688,1435.67 r90 top
E3 "100uF/25V" "CS 6*4 - B" 709.41,1435.67 r90 top
E4 "100uF/25V" "CS 6*4 - B" 1035.61,1435.67 r90 top
E5 "100uF/25V" "CS 6*4 - B" 1688,376 r90 top
E6 "100uF/25V" "CS 6*4 - B" 1361.8,376 r90 top
E7 "100uF/25V" "CS 6*4 - B" 1035.61,376 r90 top
E8 "100uF/25V" "CS 6*4 - B" 709.41,376 r90 top
J1 "SATA15P" "SATA 15P 贴片" 1927.6,2547.04 r180 bottom locked
J2 "SATA15P" "SATA 15P 贴片" 1927.6,1441.78 r180 bottom locked
J3 "SATA15P" "SATA 15P 贴片" 1927.6,333.8 r180 bottom locked
J4 "Typec 24p" "TypeC 24p 直立" 3389,2728 r270 top locked
J5 "USB3.1_Type-A" "USB3.1_Type-A 立式直插" 2836,2753 r0 top locked
JP1 "HDR-1X2" ZH1.5-WS-2P 537,2301 r45 top
JP2 "HDR-1X2" XH2.54-WS-2P 286,417 r90 top
L1 "2.2uH" NR8040 262,1266 r90 top
L2 "1uH" NR4020 1088,2873.06 r270 top
L3 "2uH" NR4020 1089,2431.94 r90 top
L4 "4.7uH" NR2520 2943,535 r270 bottom
L5 "4.7uH" NR2520 2940.1,1286 r270 bottom
L6 "4.7uH" NR2520 2943,2046 r270 bottom
LED3 "blue" "LED 0805B" 104,642.55 r270 bottom locked
LED4 "green" "LED 0805G" 104,397.46 r90 bottom locked
LED5 "blue" "LED 0805B" 104,1750.53 r270 bottom locked
LED6 "green" "LED 0805G" 104,1505.44 r90 bottom locked
LED7 "blue" "LED 0805B" 104,2855 r270 bottom locked
LED8 "green" "LED 0805G" 104,2609.91 r90 bottom locked
MR1 "MARK1.6" "Mark 1" 3277,250 r180 bottom
MR2 "MARK1.6" "Mark 1" 3452,256 r0 top
MR3 "MARK1.6" "Mark 1" 209,2669 r180 bottom
MR4 "MARK1.6" "Mark 1" 86,2896 r0 top
Q1 "AO3401" DFN8-L3.0-W3.0-P0.65_EP 165,2392 r270 top
R1 "4.7R 1%" R0402_L 159,1548.73 r270 top
R2 "1M 1%" R0402_L 100,1533 r180 top
R3 "499K 5%" R0402_L 175.73,1785 r180 top
R4 "499R 1%" R0402_L 100.25,1617 r0 top
R5 "150K 1%" R0402_L 100,1659 r180 top
R6 "100K 5%" R0402_L 100,1743 r180 top
R7 "18K 1%" R0402_L 100.25,1701 r0 top
R8 "10K 1%" R0402_L 1667,2600 r45 top
R9 "100K 1%" R0402_L 935,2928.75 r270 top
R10 "100K 1%" R0402_L 935,2376.25 r90 top
R11 "10K 1%" R0402_L 320,2476 r270 top
R12 "130K 1%" R0402_L 978,2929 r90 top
R13 "130K 1%" R0402_L 978,2376 r270 top
R14 "390K 1%" R0402_L 978,2816 r270 top
R15 "390K 1%" R0402_L 978,2488.27 r90 top
R16 "130K 1%" R0402_L 935,2816.25 r90 top
R17 "88.7K 1%" R0402_L 934,2488.01 r270 top
R20 "4.7K 1%" R0402_L 44,673 r90 bottom
R21 "4.7K 1%" R0402_L 44,367 r270 bottom
R22 "4.7K 1%" R0402_L 44,1781 r90 bottom
R23 "4.7K 1%" R0402_L 44,1475 r270 bottom
R24 "4.7K 1%" R0402_L 44,2886 r90 bottom
R25 "4.7K 1%" R0402_L 44,2579.73 r270 bottom
R26 "330K 1%" R0402_L 3029.28,501 r180 bottom
R27 "330K 1%" R0402_L 3029.28,1252 r180 bottom
R28 "4.7K 1%" R0402_L 3029.28,459 r180 bottom
R29 "4.7K 1%" R0402_L 3029.28,1210 r180 bottom
R30 "100K 1%" R0402_L 3198,804.87 r270 bottom
R31 "100K 1%" R0402_L 3198,1555.87 r270 bottom
R32 "12K 1%" R0402_L 3098,376.41 r270 bottom
R33 "12K 1%" R0402_L 3098,1127.41 r270 bottom
R34 "330K 1%" R0402_L 3029.28,2012 r180 bottom
R35 "4.7K 1%" R0402_L 3029.28,1970 r180 bottom
R36 "100K 1%" R0402_L 3198,2315.87 r270 bottom
R37 "12K 1%" R0402_L 3098,1887.41 r270 bottom
R38 "10K 1%" R0402_L 2249,2896 r270 bottom
R39 "10K 1%" R0402_L 2292,2896 r270 bottom
R40 "4.7K 1%" R0402_L 1846.17,2420.17 r225 top
R41 "4.7K 1%" R0402_L 1756.17,2510.17 r225 top
R42 "4.7K 1%" R0402_L 1726.17,2540.17 r225 top
R43 "4.7K 1%" R0402_L 1961.27,2350 r180 top
R44 "4.7K 1%" R0402_L 2037,2350 r0 top
R45 "10K 1%" R0402_L 2335,2896.25 r90 bottom
R46 "20K 1%" R0402_L 2288,2550 r90 bottom
R47 "20K 1%" R0402_L 2332,2550 r90 bottom
R48 "4.7K 1%" R0402_L 2090,2369 r315 top
R49 "12.4k 1%" R0402_L 1792,2818 r135 top
R50 "4.7K 1%" R0402_L 1801,2936 r180 top
R51 "1M 1%" R0402_L 1862,2886 r135 top
R52 "4.7K 1%" R0402_L 1959,2936 r180 top
R53 "10K 1%" R0402_L 1892,2916 r315 top
R54 "4.7K 1%" R0402_L 2035.73,2936 r0 top
R55 "4.7K 1%" R0402_L 2288,2732 r45 top
TP1 "M3hole" m3内嵌螺母贴片 256,775 r0 top
TP2 "M3hole" m3内嵌螺母贴片 3448,2438 r0 top
TP3 "M3hole" m3内嵌螺母贴片 761,2663 r0 top
TP4 "M3hole" m3内嵌螺母贴片 3452,921 r0 top
U1 "MP8757" MP8757 331.09,1659 r0 top
U2 "MP9148" SOT23-8 1105,2654 r90 top
U3 "JMS578" QFN48-L6.0-W6.0-P0.4 3246,591 r270 bottom
U4 "JMS578" QFN48-L6.0-W6.0-P0.4 3246,1342 r270 bottom
U5 "P25Q21H" SOP8_L 2989.39,872 r0 bottom
U6 "P25Q21H" SOP8_L 2989.39,1623 r0 bottom
U7 "JMS578" QFN48-L6.0-W6.0-P0.4 3246,2102 r270 bottom
U8 "P25Q21H" SOP8_L 2989.39,2383 r0 bottom
U9 "VL160" MQFN-28_L4.5-W3.5-P0.40-BL-EP 2313,2726 r270 bottom
U10 "VL822 Q7" QFN-76_L9.0-W9.0-P0.40-EP6.3-TL 1998,2645 r135 top locked
U11 "TPD4E02B04" DIO_TPD4E02B04DQAR 3183,2583 r180 bottom
U12 "TPD4E02B04" DIO_TPD4E02B04DQAR 3183,2872 r180 bottom
U13 "P25Q21H" SOP8_L 1505,2467 r180 top
Y1 "30Mhz" "OSC 3225-4P" 3430.46,335.34 r270 bottom
Y2 "30Mhz" "OSC 3225-4P" 3430.46,1086.34 r270 bottom
Y3 "30Mhz" "OSC 3225-4P" 3430.46,1846.34 r270 bottom
Y4 "25Mhz" "OSC 3225-4P" 1600,2869 r270 top

## Footprints (in the part's own frame and the unit in brackets; to place one, negate y for a bottom-side part, rotate by r counter-clockwise, add the part's x,y. Pads: shape width x height; smd on the part's side, far side on the other; paste and mask are expansions set on the pad)
C0402_L [mm] "贴片MLCC电容"
  rect 0.5x0.5 smd: 1(-0.45,0) 2(0.45,0)
  silkscreen extent -0.87,-0.46 0.88,0.46, body extent -0.5,-0.25 0.5,0.25, height 0.5
C0603_L [mm] "贴片MLCC电容"
  rect 0.75x0.85 smd: 1(-0.725,0) 2(0.725,0)
  silkscreen extent -1.35,-0.69 1.35,0.69, body extent -0.8,-0.4 0.8,0.4, height 0.8
C0805_L [mil] "贴片MLCC电容"
  rect 35x50 smd: 1(-37.4,0) 2(37.4,0)
  silkscreen extent -67,-36 67,36, body extent -39,-26 39,26, height 51
"CS 6*4 - B" [mm] "直径6mm，高4mm"
  rect 2.7x1 smd: 1(3,0)
  oval 2.7x1 smd: 2(-3,0)
  silkscreen extent -3.3,-3.3 3.43,3.3, body extent -3.5,-3.15 3.5,3.15, height 4.05
DC-012 [mm] "5.5*2.1"
  rect 2.6x5 hole 0.9 slot 3.5 at 90 deg: 1(0,0)
  rect 4.5x1.8 hole 0.7 slot 2.5 at 0 deg: 2(2.25,-5)
  rect 4x1.8 hole 0.7 slot 2.5 at 0 deg: 3(4.75,-2.8)
  silkscreen extent -1.35,-6.48 8,5.33, body extent -1.11,-6.47 7.89,4.53, height 13.6
DFN8-L3.0-W3.0-P0.65_EP [mm] "DFN, 8-Leads, Body 3.05x3.05mm, Pitch 0.65mm               联系卖家 免费查找封装"
  rect 0.66x0.42 smd: 1(-1.47,-0.975) 2(-1.47,0.975) 2(-1.47,-0.325) 2(-1.47,0.325) 3(1.47,0.975) 3(1.47,-0.325) 3(1.47,0.325) 3(1.47,-0.975)
  SIGNAL region: 1.33,-1.185 1.33,1.185 -0.5,1.185 -0.5,-1.185
  SIGNAL region: 0.25,-1.73 0.25,1.73 -0.32,1.73 -0.32,-1.73
  silkscreen extent -2.47,-1.59 1.53,1.59, body extent -1.53,-1.53 1.53,1.53, height 0.8
DIO_TPD4E02B04DQAR [mm]
  rect 0.565x0.2 smd mask+0: 1(-0.417,1) 2(-0.417,0.5) 4(-0.417,-0.5) 5(-0.417,-1) 6(0.417,-1) 7(0.417,-0.5) 9(0.417,0.5) 10(0.417,1)
  rect 0.565x0.4 smd paste-1 mask+0: 3(-0.417,0) 8(0.417,0)
  silkscreen extent -1.35,-1.42 0.5,1.42, body extent -0.5,-1.25 0.5,1.25, height 0.55
"LED 0805B" [mil] "蓝色0805LED"
  rect 35x50 smd: 1(-37.4,-0.01)
  oct 35x50 smd: 2(37.4,-0.01)
  silkscreen extent -64,-33 75,33, body extent -39,-25 39,25, height 32
"LED 0805G" [mil] "绿色0805LED"
  rect 35x50 smd: 1(-37.4,0)
  oct 35x50 smd: 2(37.4,0)
  silkscreen extent -64,-33 75,33, body extent -39,-25 39,25, height 32
m3内嵌螺母贴片 [mm]
  round 3.2 smd: 4(0,0)
"Mark 1" [mm] "光学定位点，直径1mm"
  round 1 smd paste-1 mask+0.635: Mark(0,0)
  SIGNAL pour cut-out: 0,-1.143 -0.437,-1.056 -0.808,-0.808 -1.056,-0.437 -1.143,0 -1.143,0 -1.056,0.437 -0.808,0.808 -0.437,1.056 0,1.143 0,1.143 0.437,1.056 0.808,0.808 1.056,0.437 1.143,0 1.143,0 1.056,-0.437 0.808,-0.808 0.437,-1.056 0,-1.143
MP8757 [mm]
  rect 0.267x0.902 smd: 1(-0.875,-1.451) 2(-0.175,-1.451) 3(0.525,-1.451) 10(0.875,1.451) 11(0.175,1.451) 12(-0.525,1.451)
  rect 1x0.2 smd: 4(1.9,-1) 5(1.9,-0.6) 6(1.9,-0.2) 7(1.9,0.2) 8(1.9,0.6) 9(1.9,1) 13(-1.9,1) 14(-1.9,0.6) 15(-1.9,0.2) 16(-1.9,-0.2) 17(-1.9,-0.6) 18(-1.9,-1)
  rect 0.267x1.35 smd: 19(-0.44,0) 20(0.16,0) 21(0.76,0)
  silkscreen extent -2,-2.05 2,1.5, body extent -2.01,-1.51 2.01,1.51, height 0.92
MQFN-28_L4.5-W3.5-P0.40-BL-EP [mm]
  rect 0.2x0.7 smd paste-100: 1(-1.8,-1.7) 2(-1.4,-1.7) 3(-1,-1.7) 4(-0.6,-1.7) 5(-0.2,-1.7) 6(0.2,-1.7) 7(0.6,-1.7) 8(1,-1.7) 9(1.4,-1.7) 10(1.8,-1.7) 15(1.8,1.7) 16(1.4,1.7) 17(1,1.7) 18(0.6,1.7) 19(0.2,1.7) 20(-0.2,1.7) 21(-0.6,1.7) 22(-1,1.7) 23(-1.4,1.7) 24(-1.8,1.7)
  rect 0.7x0.2 smd paste-100: 11(2.2,-0.6) 12(2.2,-0.2) 13(2.2,0.2) 14(2.2,0.6) 25(-2.2,0.6) 26(-2.2,0.2) 27(-2.2,-0.2) 28(-2.2,-0.6)
  rect 3x2 smd paste-100: 29(0,0)
  silkscreen extent -2.41,-1.78 2.29,1.78, body extent -2.26,-1.76 2.26,1.76, height 0.86
NR2520 [mm] "2.5mm*2.0mm*1.0mm(长*宽*高）"
  rect 0.85x2 smd: 1(-1.025,0) 2(1.025,0)
  silkscreen extent -1.52,-1.27 1.52,1.27, body extent -1.25,-1 1.25,1, height 1.1
NR4020 [mm] "4.0mm*4.0mm*2.0mm(长*宽*高）"
  rect 1.1x3.7 smd: 1(-1.5,0) 2(1.5,0)
  silkscreen extent -2.29,-2.03 2.29,2.03, body extent -2,-2 2,2, height 2.1
NR8040 [mm] "8.0mm*8.0mm*4.0mm(长*宽*高）"
  rect 2.2x7.5 smd: 1(-3,0) 2(3,0)
  silkscreen extent -4.44,-4.06 4.44,4.06, body extent -4,-4 4,4, height 4.1
"OSC 3225-4P" [mm] "3.2*2.5*0.7mm(长宽高)"
  rect 1.3x1.2 smd: 1(-1.05,-0.85) 2(1.05,-0.85) 3(1.05,0.85) 4(-1.05,0.85)
  silkscreen extent -2.03,-1.75 1.91,1.65, body extent -1.6,-1.25 1.6,1.25, height 0.7
QFN48-L6.0-W6.0-P0.4 [mm] "QFN, 48-Leads, Body 6.00x6.00mm, Pitch 0.40mm, Thermal Pad 4.30x4.30mm封装库来自淘宝卖家 ID：黄晶宝石"
  oval 0.7x0.2 smd: 1(-3,2.2) 2(-3,1.8) 3(-3,1.4) 4(-3,1) 5(-3,0.6) 6(-3,0.2) 7(-3,-0.2) 8(-3,-0.6) 9(-3,-1) 10(-3,-1.4) 11(-3,-1.8) 12(-3,-2.2) 25(3,-2.2) 26(3,-1.8) 27(3,-1.4) 28(3,-1) 29(3,-0.6) 30(3,-0.2) 31(3,0.2) 32(3,0.6) 33(3,1) 34(3,1.4) 35(3,1.8) 36(3,2.2)
  oval 0.2x0.7 smd: 13(-2.2,-3) 14(-1.8,-3) 15(-1.4,-3) 16(-1,-3) 17(-0.6,-3) 18(-0.2,-3) 19(0.2,-3) 20(0.6,-3) 21(1,-3) 22(1.4,-3) 23(1.8,-3) 24(2.2,-3) 37(2.2,3) 38(1.8,3) 39(1.4,3) 40(1,3) 41(0.6,3) 42(0.2,3) 43(-0.2,3) 44(-0.6,3) 45(-1,3) 46(-1.4,3) 47(-1.8,3) 48(-2.2,3)
  rect 3.3x3.3 smd: 49(0,0)
  silkscreen extent -3.92,-3.15 3.15,3.15, body extent -3,-3 3,3, height 0.9
QFN-76_L9.0-W9.0-P0.40-EP6.3-TL [mm]
  oval 0.8x0.2 smd paste-100: 1(-4.45,3.599) 2(-4.45,3.2) 3(-4.45,2.799) 4(-4.45,2.4) 5(-4.45,1.999) 6(-4.45,1.6) 7(-4.45,1.199) 8(-4.45,0.8) 9(-4.45,0.399) 10(-4.45,0) 11(-4.45,-0.399) 12(-4.45,-0.8) 13(-4.45,-1.199) 14(-4.45,-1.6) 15(-4.45,-1.999) 16(-4.45,-2.4) 17(-4.45,-2.799) 18(-4.45,-3.2) 19(-4.45,-3.599) 39(4.45,-3.599) 40(4.45,-3.2) 41(4.45,-2.799) 42(4.45,-2.4) 43(4.45,-1.999) 44(4.45,-1.6) 45(4.45,-1.199) 46(4.45,-0.8) 47(4.45,-0.399) 48(4.45,0) 49(4.45,0.399) 50(4.45,0.8) 51(4.45,1.199) 52(4.45,1.6) 53(4.45,1.999) 54(4.45,2.4) 55(4.45,2.799) 56(4.45,3.2) 57(4.45,3.599)
  oval 0.2x0.8 smd paste-100: 20(-3.599,-4.45) 21(-3.2,-4.45) 22(-2.799,-4.45) 23(-2.4,-4.45) 24(-1.999,-4.45) 25(-1.6,-4.45) 26(-1.199,-4.45) 27(-0.8,-4.45) 28(-0.399,-4.45) 29(0,-4.45) 30(0.399,-4.45) 31(0.8,-4.45) 32(1.199,-4.45) 33(1.6,-4.45) 34(1.999,-4.45) 35(2.4,-4.45) 36(2.799,-4.45) 37(3.2,-4.45) 38(3.599,-4.45) 58(3.599,4.45) 59(3.2,4.45) 60(2.799,4.45) 61(2.4,4.45) 62(1.999,4.45) 63(1.6,4.45) 64(1.199,4.45) 65(0.8,4.45) 66(0.399,4.45) 67(0,4.45) 68(-0.399,4.45) 69(-0.8,4.45) 70(-1.199,4.45) 71(-1.6,4.45) 72(-1.999,4.45) 73(-2.4,4.45) 74(-2.799,4.45) 75(-3.2,4.45) 76(-3.599,4.45)
  rect 5.5x5.5 smd paste-100: 77(0,0)
  silkscreen extent -5.36,-4.7 4.7,4.7, body extent -4.5,-4.5 4.5,4.5, height 0.85
R0402_L [mm] "1/16W贴片电阻"
  rect 0.5x0.5 smd: 1(-0.425,0) 2(0.425,0)
  silkscreen extent -0.88,-0.46 0.87,0.46, body extent -0.5,-0.25 0.5,0.25, height 0.3
"SATA 15P 贴片" [mm] "SATA"
  rect 0.6x2.9 smd: P1(16.99,1.5) P2(18.26,1.5) P3(19.53,1.5) P4(20.8,1.5) P5(22.07,1.5) P6(23.34,1.5) P7(24.61,1.5) P8(25.88,1.5) P9(27.15,1.5) P10(28.42,1.5) P11(29.69,1.5) P12(30.96,1.5) P13(32.23,1.5) P14(33.5,1.5) P15(34.77,1.5) S1(3.02,1.5) S2(4.29,1.5) S3(5.56,1.5) S4(6.83,1.5) S5(8.1,1.5) S6(9.37,1.5) S7(10.64,1.5)
  rect 2.4x2.8 smd: SH1(-3.19,0) SH2(40.75,0)
  round 1 hole 1.2 unplated: ""(0,0) ""(38,0)
  body extent -3.97,-2.88 41.47,2.68, height 10.2
SOP8_L [mm] "4*5*1.8mm（长宽高）"
  rect 1.5x0.5 smd: 1(-2.5,1.905)
  oval 1.5x0.5 smd: 2(-2.5,0.635) 3(-2.5,-0.635) 4(-2.5,-1.905) 5(2.5,-1.905) 6(2.5,-0.635) 7(2.5,0.635) 8(2.5,1.905)
  silkscreen extent -2.69,-2.5 1.52,3.2, body extent -3,-2.5 3,2.5, height 1.9
SOT23-8 [mil] "SOT23, 8-Leads, Body 2.9x1.75mm, Pitch 0.65mm  联系卖家 免费查找封装"
  rect 38.5x17 smd paste+0: 1(-53.75,38.39) 2(-53.75,12.8) 3(-53.75,-12.8) 4(-53.75,-38.39) 5(53.75,-38.39) 6(53.75,-12.8) 7(53.75,12.8) 8(53.75,38.39)
  silkscreen extent -70,-61 20,70, body extent -55,-59 55,59, height 47
"TypeC 24p 直立" [mm]
  rect 0.3x1 smd paste-100: A1(-2.75,0.72) A2(-2.25,0.72) A3(-1.75,0.72) A4(-1.25,0.72) A5(-0.75,0.72) A6(-0.25,0.72) A7(0.25,0.72) A8(0.75,0.72) A9(1.25,0.72) A10(1.75,0.72) A11(2.25,0.72) A12(2.75,0.72) B1(2.75,-0.72) B2(2.25,-0.72) B3(1.75,-0.72) B4(1.25,-0.72) B5(0.75,-0.72) B6(0.25,-0.72) B7(-0.25,-0.72) B8(-0.75,-0.72) B9(-1.25,-0.72) B10(-1.75,-0.72) B11(-2.25,-0.72) B12(-2.75,-0.72)
  round 1.3 hole 0.7: SH1(-2.4,-2.15) SH2(2.4,-2.15) SH3(2.4,2.15) SH4(-2.4,2.15)
  Keep-Out Layer board cut-out: -3.42,0 -3.42,-0.066 -3.47,-0.187 -3.563,-0.28 -3.684,-0.33 -3.816,-0.33 -3.937,-0.28 -4.03,-0.187 -4.08,-0.066 -4.08,0 -4.08,0.066 -4.03,0.187 -3.937,0.28 -3.816,0.33 -3.684,0.33 -3.563,0.28 -3.47,0.187 -3.42,0.066 -3.42,0 -3.42,0
  Keep-Out Layer board cut-out: 4.244,0 4.244,-0.056 4.203,-0.16 4.126,-0.241 4.024,-0.287 3.968,-0.29 3.968,-0.29 3.556,-0.29 3.499,-0.289 3.393,-0.245 3.312,-0.163 3.268,-0.057 3.268,0 3.268,0.058 3.312,0.164 3.393,0.245 3.499,0.29 3.556,0.29 3.556,0.29 3.97,0.29 4.026,0.287 4.127,0.24 4.203,0.159 4.244,0.056 4.244,0 4.244,0
  Keep-Out Layer circle w0.005: c-3.75,0 r0.33
  Keep-Out Layer region: -3.42,0 -3.42,-0.066 -3.47,-0.187 -3.563,-0.28 -3.684,-0.33 -3.816,-0.33 -3.937,-0.28 -4.03,-0.187 -4.08,-0.066 -4.08,0 -4.08,0.066 -4.03,0.187 -3.937,0.28 -3.816,0.33 -3.684,0.33 -3.563,0.28 -3.47,0.187 -3.42,0.066 -3.42,0 -3.42,0
  Keep-Out Layer region: 4.244,0 4.244,-0.056 4.203,-0.16 4.126,-0.241 4.024,-0.287 3.968,-0.29 3.968,-0.29 3.556,-0.29 3.499,-0.289 3.393,-0.245 3.312,-0.163 3.268,-0.057 3.268,0 3.268,0.058 3.312,0.164 3.393,0.245 3.499,0.29 3.556,0.29 3.556,0.29 3.97,0.29 4.026,0.287 4.127,0.24 4.203,0.159 4.244,0.056 4.244,0 4.244,0
  Keep-Out Layer lines w0.005: 3.968,-0.29 ccw(c3.954,0) 4.244,0 ccw(c3.954,0) 3.97,0.29 3.556,0.29 ccw(c3.558,0) 3.268,0 ccw(c3.558,0) 3.556,-0.29 3.968,-0.29
  silkscreen extent -5,-2 5,2, body extent -4.47,-2.3 4.47,2.3, height 9.2
"USB3.1_Type-A 立式直插" [mil] "USB接口"
  round 47.2 hole 27.6: 1(-137.8,-29.5) 2(-39.4,-29.5) 3(39.4,-29.5) 4(137.8,-29.5) 5(157.5,29.5) 6(78.7,29.5) 7(0,29.5) 8(-78.7,29.5) 9(-157.5,29.5)
  round 118.1 hole 90.9: 10(-252,-25.6) 11(252,-25.6)
  silkscreen extent -270,-149 270,91, body extent -283,-163 283,112, height 461
XH2.54-WS-2P [mm] "长：10mm，宽：8mm，高：6.1mm"
  rect 2x3.5 smd: 0(-4.327,-2.15) 0(4.327,-2.15)
  rect 1.2x3.5 smd: 1(-1.25,4.981) 2(1.25,4.981)
  silkscreen extent -5,-4.06 5,4.06, body extent -5,-4 5,6.42, height 6.05
ZH1.5-WS-2P [mm] "长：6.1mm，宽：2.5mm，高：3.7mm"
  rect 1.5x1.95 smd: 0(-2.818,0) 0(2.818,0)
  rect 0.8x2.5 smd: 1(-0.75,4.05) 2(0.75,4.05)
  silkscreen extent -3.05,-2 3.03,4.06, body extent -3.05,-2 3.05,4.6, height 3.75

## Part data
C1 C2 C3 C4 C5 C6 C7 C8 C9 C10 C11 C12 C13 C14 C15 C16 C17 C18 C19 C20 C21 C22 C23 C24 C25 C26 C27 C28 C29 C30 C31 C32 C33 C34 C35 C36 C37 C38 C39 C40 C41 C42 C43 C44 C45 C46 C47 C48 C49 C50 C51 C52 C53 C54 C55 C56 C57 C58 C59 C60 C61 C62 C63 C64 C65 C66 C67 C68 C69 C70 C71 C72 C73 C74 C75 C76 C77 C78 C79 C80 C81 C82 C83 C84 C85 C86 C87 C88 C89 C90 C91 C92 C93 C94 C95 C96 C97 C98 C99 C100 C101 C102 C103 C104 C105 C106 C107 C108 C109 C110 C111 C112 C113 C114 C115 C116 C117 C118 C119 C120 C121 C122 C123 C124 C125 C126 C127: library part C, "无极性贴片电容", BOM名称=无极性贴片电容, 学习资源=www.ooocke.com, 材质=X7R, 版权归属=源创客
CON1: library part P-DC, "低压电源接口", BOM名称=DC电源接口, 学习资源=www.ooocke.com, 版权归属=源创客
E1 E2 E3 E4 E5 E6 E7 E8: library part C-CD, "贴片钽电容", BOM名称=贴片钽电容, 学习资源=www.ooocke.com, 版权归属=源创客
J4: "USB-C (USB TYPE-C) USB 3.2 Gen 2 (USB 3.1 Gen 2, Superspeed + (USB 3.1)) Receptacle Connector 24 Position Surface Mount, Right Angle; Through Hole", Package=None, Check_prices=https://www.snapeda.com/parts/1054500101/Molex/view-part/?ref=eda, MF=Molex, MP=1054500101, SnapEDA_Link=https://www.snapeda.com/parts/1054500101/Molex/view-part/?ref=snap
J5: "USB接口"
JP1 JP2: library part "Header 2", "2P接插件", BOM名称=2P接插件, 学习资源=www.ooocke.com, 版权归属=源创客
L1 L2 L3 L4 L5 L6: library part L, "小功率贴片电感", BOM名称=小功率贴片电感, 学习资源=www.ooocke.com, 版权归属=源创客
LED3 LED4 LED5 LED6 LED7 LED8: library part LED-3MM, "插件LED", BOM名称=插件LED, 学习资源=www.ooocke.com, 版权归属=源创客
MR1 MR2 MR3 MR4: library part MARK, "光学定位点", BOM名称=光学定位点, 学习资源=www.ooocke.com, 版权归属=源创客
Q1: "P沟道 30V/4.2A", BOM名称=场效应管, 学习资源=www.ooocke.com, 描述="P沟道 30V/4.2A", 版权归属=源创客
R1 R2 R3 R4 R5 R6 R7 R8 R9 R10 R11 R12 R13 R14 R15 R16 R17 R20 R21 R22 R23 R24 R25 R26 R27 R28 R29 R30 R31 R32 R33 R34 R35 R36 R37 R38 R39 R40 R41 R42 R43 R44 R45 R46 R47 R48 R49 R50 R51 R52 R53 R54 R55: library part R, "贴片电阻", BOM名称=贴片电阻, 学习资源=www.ooocke.com, 版权归属=源创客
TP1 TP2 TP3 TP4: library part TEST, "测试点", BOM名称=测试点, 学习资源=www.ooocke.com, 版权归属=源创客
U1: "DCDC控制器"
U2: "BUCK"
U5 U6 U8 U13: library part P25D40H
U11 U12: "ESD"
Y1 Y2 Y3 Y4: library part Crystal

## Via types
v1: diameter 15.75, hole 11.81, SIGNAL to SIGNAL (Bottom), tented both sides, 439 vias

## Nets (pads, with @x,y where several pads share a name; then routed paths per layer and width w, separated by ;. In a path a pad name is that pad's centre, name@x,y a point inside that pad or via, vN(x,y) a via of type N, cw(c..) or ccw(c..) an arc to the next point about the centre after c; other vN are vias at no path point)
cap_RX1_N: C26.1 J3.S5 | length 715.3
  SIGNAL (Bottom) w4.29: 1608.19,257.81 1605.01,260.99 cw(c1644.02,300) 1588.85,300 1588.85,366.22 cw(c1612.45,366.22) 1599.04,385.64 J3.S5@1608.71,392.86 ; 1608.23,257.77 ccw(c1665,314.61) 1665,234.28 1993.95,234.28 ccw(c1993.95,257.87) 2010.6,241.15 2017.72,248.28 cw(c2041.63,224.26) 2041.63,258.14 2120.3,258.14 2129.65,258.15 cw(c2129.74,224.26) 2129.74,258.15 ccw(c2129.74,281.74) 2147.59,266.3 C26.1@2155.28,274
cap_RX1_P: C29.1 J3.S6 | length 731.5
  SIGNAL (Bottom) w4.29: J3.S6@1558.71,392.86 1568.37,385.64 cw(c1554.97,366.22) 1578.56,366.22 1578.56,299.96 ccw(c1643.93,299.96) 1597.71,253.74 1600.94,250.5 ccw(c1664.96,314.52) 1600.99,250.46 ccw(c1664.96,314.52) 1664.96,223.99 1993.95,223.99 ccw(c1993.95,257.87) 2017.86,233.86 2024.98,240.98 cw(c2041.63,224.26) 2041.63,247.85 2120.3,247.85 2129.66,247.86 cw(c2129.74,224.26) 2129.74,247.86 cw(c2129.74,224.26) 2147.59,239.7 C29.1@2155.28,232
cap_RX2_N: C25.1 J2.S5 | length 400.2
  SIGNAL (Bottom) w4.29: J2.S5@1608.71,1500.84 1599.04,1496.85 ccw(c1612.45,1477.43) 1588.85,1477.43 1588.85,1377.81 ccw(c1687.51,1377.81) 1617.75,1308.04 ccw(c1687.51,1377.81) 1687.51,1279.14 1768.74,1279.14 ccw(c1768.74,1302.74) 1786.59,1287.3 C25.1@1794.28,1295
cap_RX2_P: C28.1 J2.S6 | length 416.8
  SIGNAL (Bottom) w4.29: J2.S6@1558.71,1500.84 1568.37,1496.85 cw(c1554.97,1477.43) 1578.56,1477.43 1578.56,1373.54 ccw(c1677.22,1373.54) 1607.46,1303.78 1610.47,1300.77 ccw(c1687.51,1377.81) 1610.59,1300.65 ccw(c1687.51,1377.81) 1687.37,1268.86 ccw(c1687.51,1377.81) 1687.51,1268.85 1768.74,1268.86 cw(c1768.74,1245.26) C28.1@1786.57,1260.72 ; C28.1@1786.59,1260.7 C28.1@1794.28,1253
cap_RX3_N: C24.1 J1.S5 | length 357
  SIGNAL (Bottom) w4.29: J1.S5@1608.71,2606.09 1599.04,2579.8 ccw(c1612.45,2560.38) 1588.85,2560.38 1588.85,2456.14 ccw(c1658.85,2456.14) 1609.35,2406.65 ccw(c1658.85,2456.14) 1658.85,2386.14 1719.74,2386.14 ccw(c1719.74,2409.74) 1737.59,2394.3 C24.1@1745.28,2402
cap_RX3_P: C27.1 J1.S6 | length 374.1
  SIGNAL (Bottom) w4.29: J1.S6@1558.71,2606.09 1568.37,2579.8 cw(c1554.97,2560.38) 1578.56,2560.38 1578.56,2451.88 ccw(c1648.56,2451.88) 1599.06,2402.38 1605.09,2396.36 ccw(c1654.59,2445.85) 1654.59,2375.86 1719.74,2375.86 cw(c1719.74,2352.26) C27.1@1737.57,2367.72 ; C27.1@1737.59,2367.7 C27.1@1745.28,2360
cap_SSRX1_N: C66.2 U3.19 | length 169.1
  SIGNAL (Bottom) w5.1: U3.19@3373.95,583.13 U3.19@3374.02,583.09 ; U3.19@3373.95,583.13 U3.19@3364.11,583.13 U3.19@3373.95,583.13 ; U3.19@3373.95,583.13 U3.19@3374.02,583.09 ; U3.19@3374.02,583.09 ccw(c3386.22,608.35) 3386.22,580.3 ; U3.19@3374.02,583.09 ccw(c3386.22,608.35) 3386.22,580.3 ; 3386.22,580.3 cw(c3386.22,542.15) 3386.55,580.3 ; 3386.22,580.3 cw(c3386.22,542.15) 3386.55,580.3 ; 3386.55,580.3 3415.03,580.05 ; 3386.55,580.3 3415.03,580.05 ; 3415.03,580.05 ccw(c3415.28,608.1) C66.2@3435.54,588.71 ; 3415.03,580.05 ccw(c3415.28,608.1) C66.2@3435.54,588.71 ; C66.2@3435.54,588.71 C66.2@3442.84,596 C66.2@3435.54,588.71
cap_SSRX1_P: C68.2 U3.20 | length 169.1
  SIGNAL (Bottom) w5.1: U3.20@3373.95,567.38 cw(c3386.22,542.15) 3386.51,570.2 ; U3.20@3373.95,567.38 cw(c3386.22,542.15) 3386.51,570.2 ; U3.20@3373.95,567.38 U3.20@3364.11,567.38 U3.20@3373.95,567.38 ; 3386.51,570.2 3414.94,569.95 ; 3386.51,570.2 3414.94,569.95 ; 3414.94,569.95 ccw(c3415.28,608.1) 3415.28,569.95 ; 3414.94,569.95 ccw(c3415.28,608.1) 3415.28,569.95 ; 3415.28,569.95 cw(c3415.28,541.9) 3435.52,561.32 ccw(c3415.28,541.9) 3415.28,569.95 ; C68.2@3435.54,561.29 C68.2@3442.84,554 C68.2@3435.54,561.29
cap_SSRX2_N: C67.2 U4.19 | length 84.6
  SIGNAL (Bottom) w5.1: U4.19@3364.11,1334.13 3373.95,1334.13 3374.02,1334.09 ccw(c3386.22,1359.35) 3386.22,1331.3 cw(c3386.22,1293.15) 3386.55,1331.3 3415.03,1331.05 ccw(c3415.28,1359.1) 3435.54,1339.71 C67.2@3442.84,1347
cap_SSRX2_P: C69.2 U4.20 | length 84.6
  SIGNAL (Bottom) w5.1: U4.20@3364.11,1318.38 3373.95,1318.38 cw(c3386.22,1293.15) 3386.51,1321.2 3414.94,1320.95 ccw(c3415.28,1359.1) 3415.28,1320.95 cw(c3415.28,1292.9) C69.2@3435.52,1312.32 ; C69.2@3435.54,1312.29 C69.2@3442.84,1305
cap_SSRX4_N: C92.2 U7.19 | length 84.6
  SIGNAL (Bottom) w5.1: U7.19@3364.11,2094.13 3373.95,2094.13 3374.02,2094.09 ccw(c3386.22,2119.35) 3386.22,2091.3 cw(c3386.22,2053.15) 3386.55,2091.3 3415.03,2091.05 ccw(c3415.28,2119.1) 3435.54,2099.71 C92.2@3442.84,2107
cap_SSRX4_P: C93.2 U7.20 | length 84.6
  SIGNAL (Bottom) w5.1: U7.20@3364.11,2078.38 3373.95,2078.38 cw(c3386.22,2053.15) 3386.51,2081.2 3414.94,2080.95 ccw(c3415.28,2119.1) 3415.28,2080.95 cw(c3415.28,2052.9) C93.2@3435.52,2072.32 ; C93.2@3435.54,2072.29 C93.2@3442.84,2065
cap_SSTX1_N: C99.2 U10.4 | length 453.9
  SIGNAL w5.1: U10.4@2055.06,2454.29 2063.95,2445.41 2063.95,2441.45 2129.76,2375.63 ccw(c2138.53,2384.4) 2138.53,2372 2272.36,2372 2272.4,2371.95 2449.39,2371.95 ccw(c2449.39,2377.05) 2453,2373.45 ccw(c2449.39,2377.05) 2454.49,2377.05 2454.49,2377.78 cw(c2461.34,2377.78) 2456.49,2382.61 C99.2@2461.79,2387.9 ; C99.2@2460.29,2389.4 C99.2@2461.79,2390.9
cap_SSTX1_P: C98.2 U10.3 | length 459.8
  SIGNAL w5.1: U10.3@2043.96,2443.19 2052.84,2434.31 2056.8,2434.31 2122.66,2368.45 ; 2122.69,2368.43 ccw(c2138.47,2384.27) 2138.47,2361.9 2268.17,2361.9 2268.22,2361.85 2449.39,2361.85 cw(c2449.39,2356.75) 2453,2360.36 cw(c2449.39,2356.75) 2454.49,2356.75 2454.49,2356.03 ccw(c2461.34,2356.03) 2456.49,2351.2 C98.2@2461.79,2345.9
cap_SSTX2_N: C103.2 U10.13 | length 355.4
  SIGNAL w5.1: U10.13@2155.26,2554.49 2164.14,2545.61 2164.14,2541.65 2229.73,2476.06 ccw(c2239.53,2485.86) 2239.53,2472 2328.92,2472 ccw(c2328.92,2498.08) 2347.34,2479.63 2352.93,2485.21 cw(c2379.1,2459.04) 2352.97,2485.25 cw(c2379.1,2459.04) 2379.1,2496.05 2445.89,2496.05 ccw(c2445.89,2501.15) 2449.5,2497.54 ccw(c2445.89,2501.15) 2450.99,2501.15 2450.99,2501.87 cw(c2457.84,2501.87) 2452.99,2506.7 C103.2@2458.28,2512
cap_SSTX2_P: C102.2 U10.12 | length 363.7
  SIGNAL w5.1: U10.12@2144.16,2543.39 2153.04,2534.51 2157,2534.51 2222.64,2468.87 ccw(c2239.46,2485.69) 2222.7,2468.81 ccw(c2239.46,2485.69) 2239.39,2461.9 ccw(c2239.46,2485.69) 2239.46,2461.9 2333.1,2461.9 ccw(c2333.1,2487.98) 2351.53,2469.53 2360,2478 cw(c2379.19,2458.81) 2379.19,2485.95 2445.89,2485.95 cw(c2445.89,2480.85) 2449.5,2484.46 cw(c2445.89,2480.85) 2450.99,2480.85 2450.99,2480.13 ccw(c2457.84,2480.13) 2452.99,2475.3 C102.2@2458.28,2470
cap_SSTX3_N: C105.2 U10.26 | length 334.7
  SIGNAL w5.1: U10.26@2155.26,2735.51 2163.61,2743.86 ccw(c2154.5,2770.39) 2174.34,2750.56 ; 2174.36,2750.58 2233.82,2810.04 ; 2233.83,2810.05 cw(c2260.84,2783.11) 2238.13,2813.76 2243.62,2817.83 cw(c2253.53,2804.45) 2253.15,2821.09 2259.98,2821.25 cw(c2260.84,2783.11) 2260.84,2821.26 2299.37,2821.26 cw(c2299.37,2766.56) 2338.05,2805.24 ; 2335.18,2808.1 2338.05,2805.24 ; 2401.86,2768.28 2384.77,2785.37 ccw(c2361.84,2762.45) 2384.72,2785.42 ccw(c2361.84,2762.45) 2384.34,2785.79 ccw(c2361.84,2762.45) 2383.17,2786.86 ccw(c2361.84,2762.45) 2361.84,2794.87 2357.67,2794.87 cw(c2357.67,2817.21) 2341.87,2801.41 2338.05,2805.24 ; 2401.89,2768.26 ccw(c2421.72,2788.09) 2422.63,2760.05 C105.2@2432.95,2760.05
cap_SSTX3_P: C104.2 U10.25 | length 314.4
  SIGNAL w5.1: U10.25@2166.43,2724.34 2174.78,2732.69 cw(c2201.31,2723.58) 2181.48,2743.41 2240.97,2802.9 cw(c2260.84,2783.11) 2244.14,2805.64 2249.63,2809.71 cw(c2253.53,2804.45) 2253.38,2811 2260.17,2811.15 cw(c2260.84,2783.11) 2260.84,2811.16 2299.24,2811.16 cw(c2299.24,2766.24) 2331,2798 2334.77,2794.23 ccw(c2357.62,2817.09) 2334.8,2794.2 ccw(c2357.62,2817.09) 2357.62,2784.77 2357.67,2784.77 cw(c2357.67,2752.37) 2379.01,2776.75 cw(c2357.67,2752.37) 2380.16,2775.69 cw(c2357.67,2752.37) 2380.58,2775.28 2394.74,2761.11 cw(c2374.91,2741.28) C104.2@2402.95,2740.39 ; C104.2@2402.95,2730.05 C104.2@2402.95,2740.37
cap_SSTX4_N: C107.2 U10.32 | length 403.5
  SIGNAL w5.1: U10.32@2088.51,2802.26 2097.39,2811.14 2101.35,2811.14 2167.11,2876.9 cw(c2203.82,2840.18) 2203.82,2892.1 ; 2204.4,2892.1 2370.3,2892.1 cw(c2370.3,2854.45) 2396.93,2881.07 2398.72,2879.28 ccw(c2421,2901.56) 2421,2870.05 2429.89,2870.05 ccw(c2429.89,2875.15) 2433.5,2871.54 ccw(c2429.89,2875.15) 2434.99,2875.15 2434.99,2875.87 cw(c2441.84,2875.87) 2436.99,2880.7 C107.2@2442.28,2886
cap_SSTX4_P: C106.2 U10.31 | length 404.2
  SIGNAL w5.1: U10.31@2099.61,2791.16 2108.49,2800.04 2108.49,2804 2172.63,2868.14 cw(c2206.1,2834.66) 2172.68,2868.19 cw(c2206.1,2834.66) 2206.1,2882 2220,2882 2235,2882 2245,2872 2260,2872 2270,2882 2309,2882 2370.2,2882 cw(c2370.2,2854.2) 2389.86,2873.86 2391.63,2872.09 ccw(c2420.93,2901.4) 2420.93,2859.95 2429.89,2859.95 cw(c2429.89,2854.85) 2433.5,2858.46 cw(c2429.89,2854.85) 2434.99,2854.85 2434.99,2854.13 ccw(c2441.84,2854.13) 2436.99,2849.3 C106.2@2442.28,2844